# EAGLE board schemat - druk (EAGLE 6.4), part 1 of 2
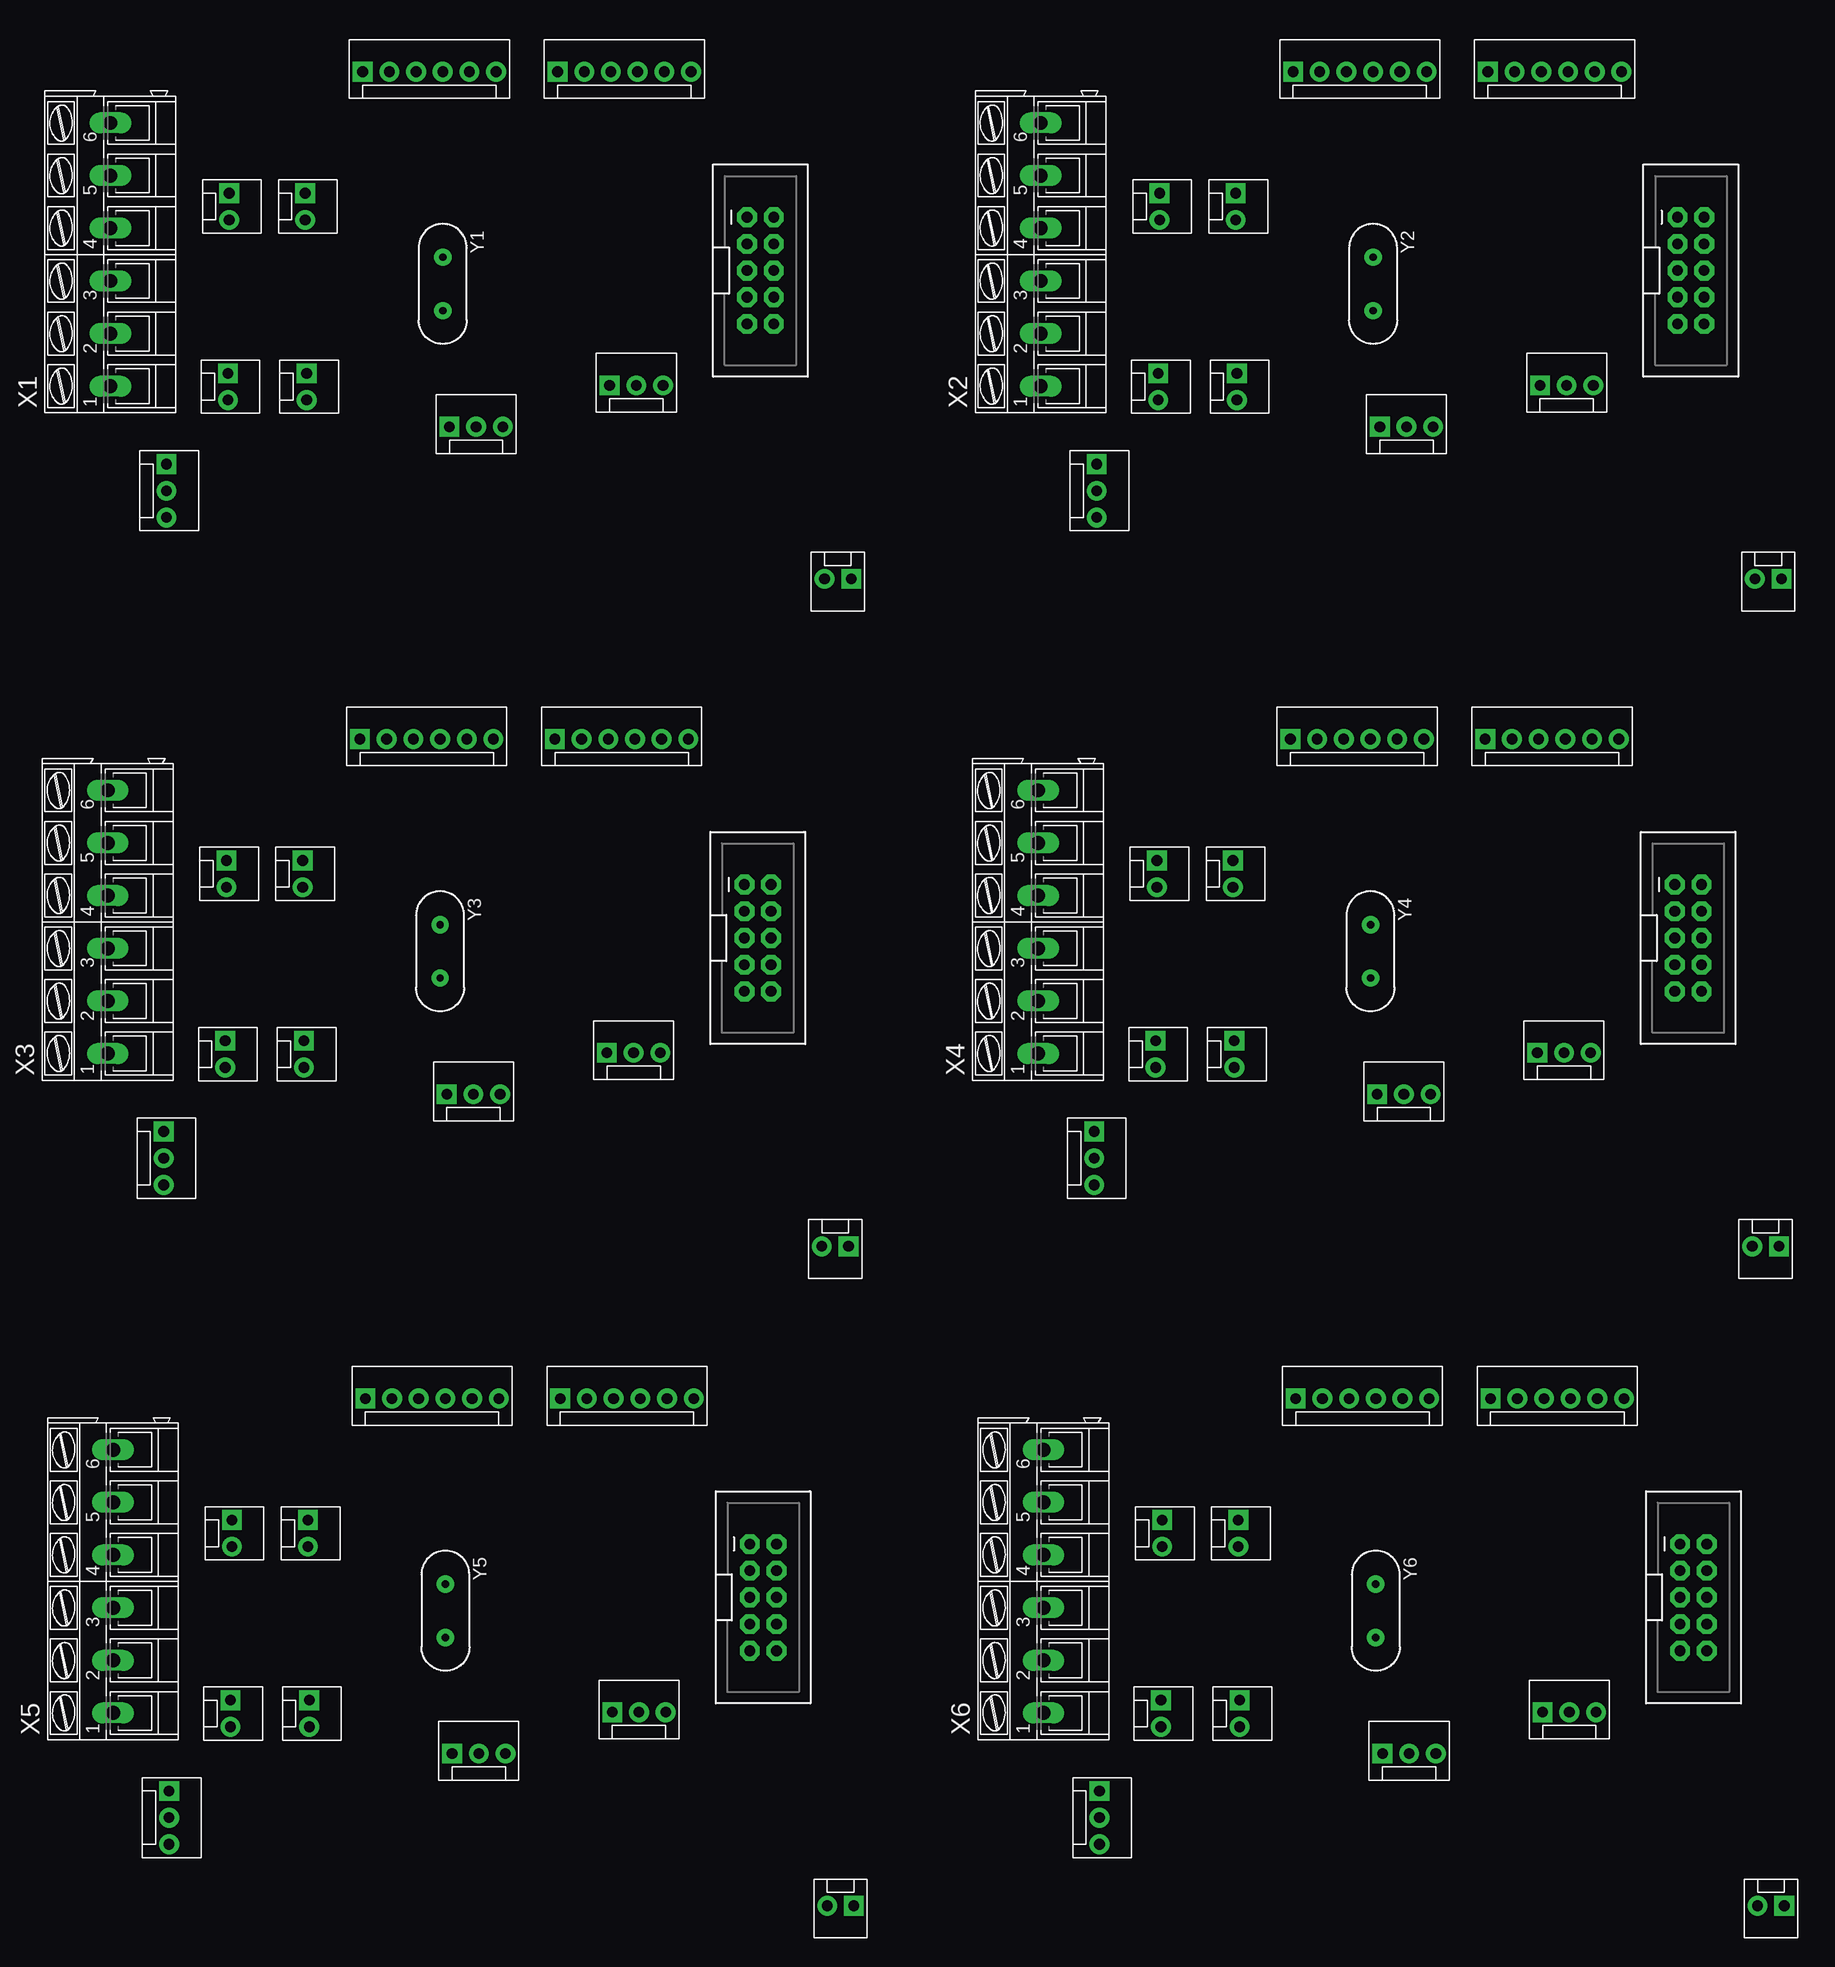
[diagram p0: board, top side]
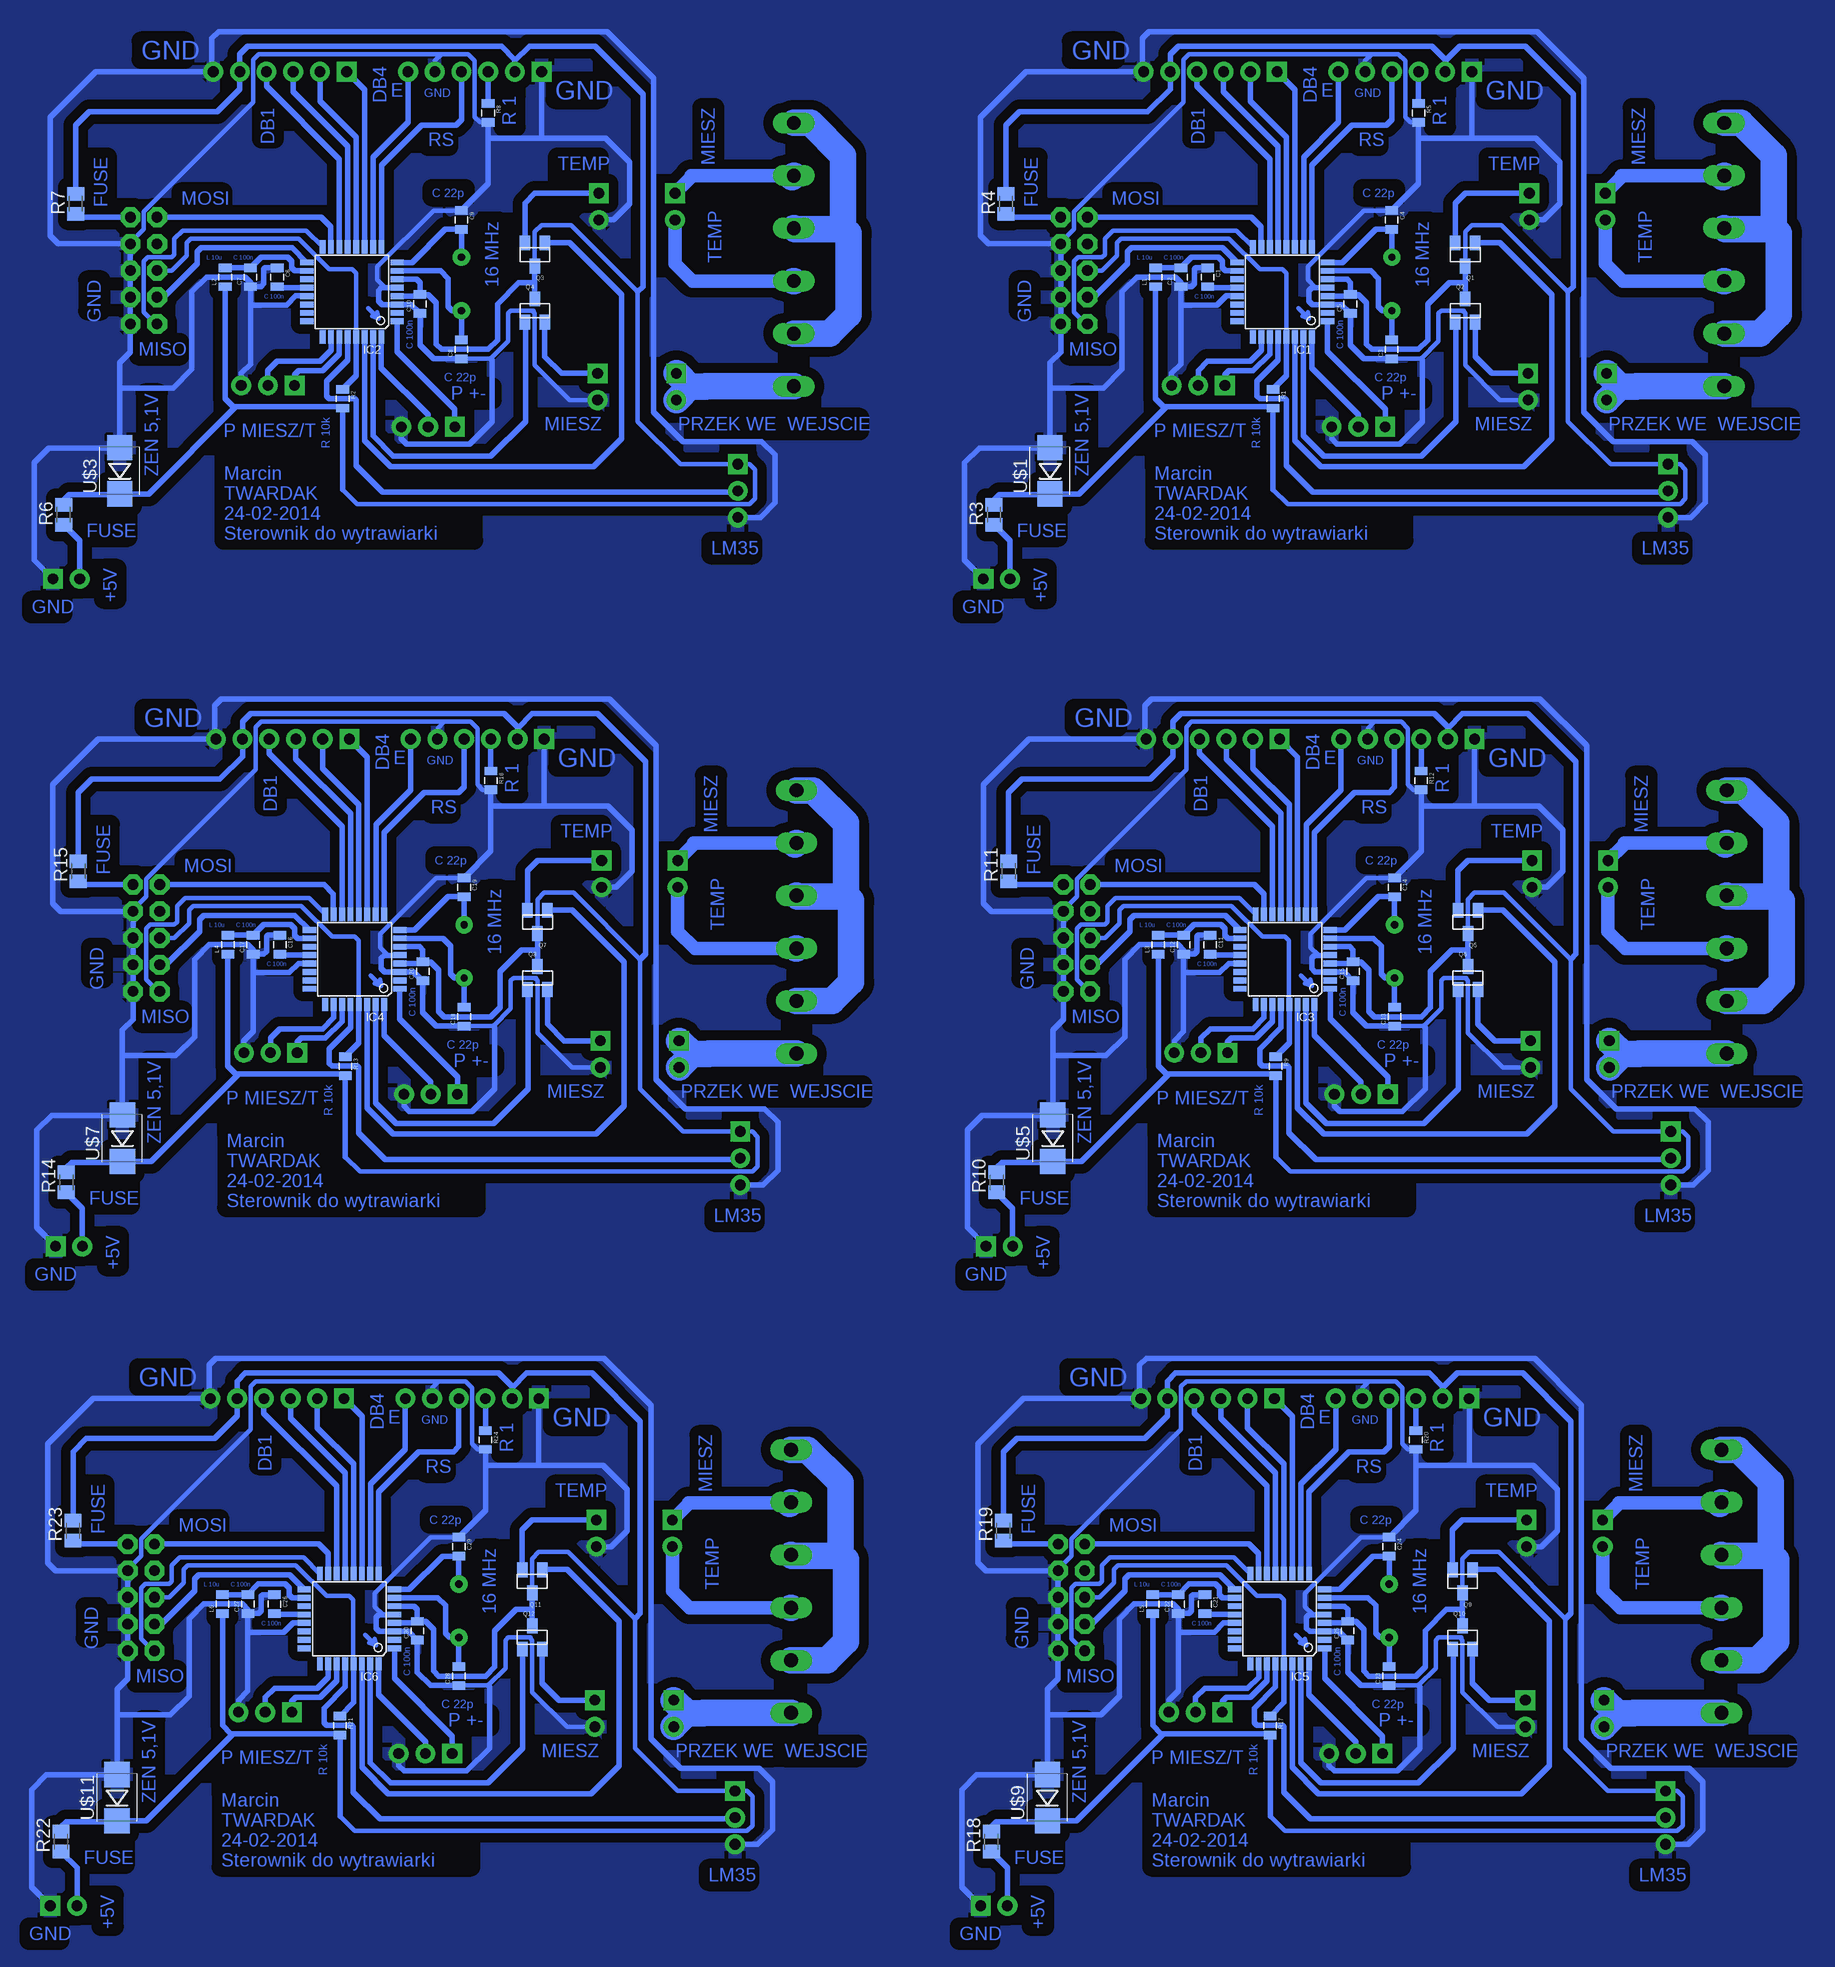
[diagram p1: board, bottom side, seen from below]

No outline drawn. Coordinates in mm, seen from the top.
Copper layers (1*16): Top 0.035mm / dielectric 1.5mm / Bottom 0.035mm
Design rules "default": minimum track width 10mil, minimum drill 24mil, track to track 8mil, track to pad 8mil, pad to pad 8mil, via to via 8mil, smd to smd 8mil, copper to edge 40mil, drill to drill 8mil, minimum pad ring 10mil, minimum via ring 8mil, stop-mask expansion 4mil, vias tented up to drill 0mil, thermal gap 10mil

## Footprints (pad centres in the part's own frame; a part is rotated, then mirrored left to right if it is on the bottom)
0805 = smd 0.8 x 1.2: 1 -0.9,0; 2 0.9,0
TQFP32-08 = smd 1.27 x 0.559: 1 -4.293,2.8; 2 -4.293,2; 3 -4.293,1.2; 4 -4.293,0.4; 5 -4.293,-0.4; 6 -4.293,-1.2; 7 -4.293,-2; 8 -4.293,-2.8; 17 4.293,-2.8; 18 4.293,-2; 19 4.293,-1.2; 20 4.293,-0.4; 21 4.293,0.4; 22 4.293,1.2; 23 4.293,2; 24 4.293,2.8 | smd 0.559 x 1.27: 9 -2.8,-4.293; 10 -2,-4.293; 11 -1.2,-4.293; 12 -0.4,-4.293; 13 0.4,-4.293; 14 1.2,-4.293; 15 2,-4.293; 16 2.8,-4.293; 25 2.8,4.293; 26 2,4.293; 27 1.2,4.293; 28 0.4,4.293; 29 -0.4,4.293; 30 -1.2,4.293; 31 -2,4.293; 32 -2.8,4.293
MOLEX-1X6 = drill 1.016 pad 1.88 square: 1 0,0 | drill 1.016 pad 1.88: 2 2.54,0; 3 5.08,0; 4 7.62,0; 5 10.16,0; 6 12.7,0
MOLEX-1X3 = drill 1.016 pad 1.88 square: 1 0,0 | drill 1.016 pad 1.88: 2 2.54,0; 3 5.08,0
MOLEX-1X2 = drill 1.016 pad 1.88 square: 1 0,0 | drill 1.016 pad 1.88: 2 2.54,0
SOT23 = smd 1 x 1.4: 1 -0.95,-1.1; 2 0.95,-1.1; 3 0,1.1
M0805 = smd 1.3 x 1.6: 1 -0.95,0; 2 0.95,0
SMB-DIODE = smd 2.4 x 2.4: A 2.2,0; C -2.2,0
2X5-SHROUDED = drill 1.016 pad 1.88 octagon: 1 -1.27,5.08; 2 1.27,5.08; 3 -1.27,2.54; 4 1.27,2.54; 5 -1.27,0; 6 1.27,0; 7 -1.27,-2.54; 8 1.27,-2.54; 9 -1.27,-5.08; 10 1.27,-5.08
AK300/6 = drill 1.321 long: 1 -12.522,0; 2 -7.518,0; 3 -2.515,0; 4 2.515,0; 5 7.518,0; 6 12.522,0
HC49US = drill 0.7 pad 1.651: 1 -2.54,0; 2 2.54,0

## Placement (x,y rotation side)
C1  100n  [0805]  51.69,100.46 270 bottom
C2  100n  [0805]  54.23,100.46 90 bottom
C3  22p  [0805]  34.16,93.6 90 bottom
C4  22p  [0805]  34.16,105.92 270 bottom
C5  100n  [0805]  38.1,97.92 90 bottom
C6  100n  [0805]  140.21,100.46 270 bottom
C7  100n  [0805]  142.75,100.46 90 bottom
C8  22p  [0805]  122.68,93.6 90 bottom
C9  22p  [0805]  122.68,105.92 270 bottom
C10  100n  [0805]  126.62,97.92 90 bottom
C11  100n  [0805]  51.44,36.96 270 bottom
C12  100n  [0805]  53.98,36.96 90 bottom
C13  22p  [0805]  33.91,30.1 90 bottom
C14  22p  [0805]  33.91,42.42 270 bottom
C15  100n  [0805]  37.85,34.42 90 bottom
C16  100n  [0805]  139.95,36.96 270 bottom
C17  100n  [0805]  142.49,36.96 90 bottom
C18  22p  [0805]  122.43,30.1 90 bottom
C19  22p  [0805]  122.43,42.42 270 bottom
C20  100n  [0805]  126.36,34.42 90 bottom
C21  100n  [0805]  51.94,-25.78 270 bottom
C22  100n  [0805]  54.48,-25.78 90 bottom
C23  22p  [0805]  34.42,-32.64 90 bottom
C24  22p  [0805]  34.42,-20.32 270 bottom
C25  100n  [0805]  38.35,-28.32 90 bottom
C26  100n  [0805]  140.46,-25.78 270 bottom
C27  100n  [0805]  143,-25.78 90 bottom
C28  22p  [0805]  122.94,-32.64 90 bottom
C29  22p  [0805]  122.94,-20.32 270 bottom
C30  100n  [0805]  126.87,-28.32 90 bottom
IC1  MEGA8-AI  [TQFP32-08]  44.58,99.06 180 bottom
IC2  MEGA8-AI  [TQFP32-08]  133.1,99.06 180 bottom
IC3  MEGA8-AI  [TQFP32-08]  44.32,35.56 180 bottom
IC4  MEGA8-AI  [TQFP32-08]  132.84,35.56 180 bottom
IC5  MEGA8-AI  [TQFP32-08]  44.83,-27.18 180 bottom
IC6  MEGA8-AI  [TQFP32-08]  133.35,-27.18 180 bottom
L1  10u  [0805]  56.64,100.46 90 bottom
L2  10u  [0805]  145.16,100.46 90 bottom
L3  10u  [0805]  56.39,36.96 90 bottom
L4  10u  [0805]  144.91,36.96 90 bottom
L5  10u  [0805]  56.9,-25.78 90 bottom
L6  10u  [0805]  145.41,-25.78 90 bottom
LCD1  [MOLEX-1X6]  45.09,120.02 0 top
LCD2  [MOLEX-1X6]  26.54,120.02 0 top
LCD3  [MOLEX-1X6]  133.6,120.02 0 top
LCD4  [MOLEX-1X6]  115.06,120.02 0 top
LCD5  [MOLEX-1X6]  44.83,56.52 0 top
LCD6  [MOLEX-1X6]  26.29,56.52 0 top
LCD7  [MOLEX-1X6]  133.35,56.52 0 top
LCD8  [MOLEX-1X6]  114.81,56.52 0 top
LCD9  [MOLEX-1X6]  45.34,-6.22 0 top
LCD10  [MOLEX-1X6]  26.8,-6.22 0 top
LCD11  [MOLEX-1X6]  133.86,-6.22 0 top
LCD12  [MOLEX-1X6]  115.32,-6.22 0 top
LM1  [MOLEX-1X3]  96.39,82.68 270 top
LM2  [MOLEX-1X3]  7.62,19.18 270 top
LM3  [MOLEX-1X3]  96.14,19.18 270 top
LM4  [MOLEX-1X3]  8.13,-43.56 270 top
LM5  [MOLEX-1X3]  96.65,-43.56 270 top
LM35  [MOLEX-1X3]  7.87,82.68 270 top
MIESZANIE  M02POLAR  [MOLEX-1X2]  21.21,91.31 270 top
MIESZANIE1  M02POLAR  [MOLEX-1X2]  109.73,91.31 270 top
MIESZANIE2  M02POLAR  [MOLEX-1X2]  20.95,27.81 270 top
MIESZANIE3  M02POLAR  [MOLEX-1X2]  109.47,27.81 270 top
MIESZANIE4  M02POLAR  [MOLEX-1X2]  21.46,-34.92 270 top
MIESZANIE5  M02POLAR  [MOLEX-1X2]  109.98,-34.92 270 top
NAPIECIE  M02POLAR  [MOLEX-1X2]  73.03,71.75 180 top
NAPIECIE1  M02POLAR  [MOLEX-1X2]  161.54,71.75 180 top
NAPIECIE2  M02POLAR  [MOLEX-1X2]  72.77,8.26 180 top
NAPIECIE3  M02POLAR  [MOLEX-1X2]  161.29,8.26 180 top
NAPIECIE4  M02POLAR  [MOLEX-1X2]  73.28,-54.48 180 top
NAPIECIE5  M02POLAR  [MOLEX-1X2]  161.8,-54.48 180 top
PRZEKAZNIK_NAPIECIE  M02POLAR  [MOLEX-1X2]  13.72,91.31 270 top
PRZEKAZNIK_NAPIECIE1  M02POLAR  [MOLEX-1X2]  102.23,91.31 270 top
PRZEKAZNIK_NAPIECIE2  M02POLAR  [MOLEX-1X2]  13.46,27.81 270 top
PRZEKAZNIK_NAPIECIE3  M02POLAR  [MOLEX-1X2]  101.98,27.81 270 top
PRZEKAZNIK_NAPIECIE4  M02POLAR  [MOLEX-1X2]  13.97,-34.92 270 top
PRZEKAZNIK_NAPIECIE5  M02POLAR  [MOLEX-1X2]  102.49,-34.92 270 top
PRZYCISKI_+-  [MOLEX-1X3]  34.8,86.23 0 top
PRZYCISKI_+-1  [MOLEX-1X3]  123.32,86.23 0 top
PRZYCISKI_+-2  [MOLEX-1X3]  34.54,22.73 0 top
PRZYCISKI_+-3  [MOLEX-1X3]  123.06,22.73 0 top
PRZYCISKI_+-4  [MOLEX-1X3]  35.05,-40.01 0 top
PRZYCISKI_+-5  [MOLEX-1X3]  123.57,-40.01 0 top
PRZYCISKI_MIESZ_TEMP  [MOLEX-1X3]  50.04,90.17 0 top
PRZYCISKI_MIESZ_TEMP1  [MOLEX-1X3]  138.56,90.17 0 top
PRZYCISKI_MIESZ_TEMP2  [MOLEX-1X3]  49.78,26.67 0 top
PRZYCISKI_MIESZ_TEMP3  [MOLEX-1X3]  138.3,26.67 0 top
PRZYCISKI_MIESZ_TEMP4  [MOLEX-1X3]  50.29,-36.07 0 top
PRZYCISKI_MIESZ_TEMP5  [MOLEX-1X3]  138.81,-36.07 0 top
Q1  N-MOSFET BSS138  [SOT23]  27.18,102.62 180 bottom
Q2  N-MOSFET BSS138  [SOT23]  27.18,97.28 0 bottom
Q3  N-MOSFET BSS138  [SOT23]  115.7,102.62 180 bottom
Q4  N-MOSFET BSS138  [SOT23]  115.7,97.28 0 bottom
Q5  N-MOSFET BSS138  [SOT23]  26.92,39.12 180 bottom
Q6  N-MOSFET BSS138  [SOT23]  26.92,33.78 0 bottom
Q7  N-MOSFET BSS138  [SOT23]  115.44,39.12 180 bottom
Q8  N-MOSFET BSS138  [SOT23]  115.44,33.78 0 bottom
Q9  N-MOSFET BSS138  [SOT23]  27.43,-23.62 180 bottom
Q10  N-MOSFET BSS138  [SOT23]  27.43,-28.96 0 bottom
Q11  N-MOSFET BSS138  [SOT23]  115.95,-23.62 180 bottom
Q12  N-MOSFET BSS138  [SOT23]  115.95,-28.96 0 bottom
R1  10k  [0805]  45.47,88.9 270 bottom
R2  10k  [0805]  133.99,88.9 270 bottom
R3  FUSE 500mA  [M0805]  72.01,77.85 90 bottom
R4  FUSE 500mA  [M0805]  70.87,107.44 90 bottom
R5  1  [0805]  31.62,116.08 270 bottom
R6  FUSE 500mA  [M0805]  160.53,77.85 90 bottom
R7  FUSE 500mA  [M0805]  159.38,107.44 90 bottom
R8  1  [0805]  120.14,116.08 270 bottom
R9  10k  [0805]  45.21,25.4 270 bottom
R10  FUSE 500mA  [M0805]  71.75,14.35 90 bottom
R11  FUSE 500mA  [M0805]  70.61,43.94 90 bottom
R12  1  [0805]  31.37,52.58 270 bottom
R13  10k  [0805]  133.73,25.4 270 bottom
R14  FUSE 500mA  [M0805]  160.27,14.35 90 bottom
R15  FUSE 500mA  [M0805]  159.13,43.94 90 bottom
R16  1  [0805]  119.89,52.58 270 bottom
R17  10k  [0805]  45.72,-37.34 270 bottom
R18  FUSE 500mA  [M0805]  72.26,-48.39 90 bottom
R19  FUSE 500mA  [M0805]  71.12,-18.8 90 bottom
R20  1  [0805]  31.88,-10.16 270 bottom
R21  10k  [0805]  134.24,-37.34 270 bottom
R22  FUSE 500mA  [M0805]  160.78,-48.39 90 bottom
R23  FUSE 500mA  [M0805]  159.64,-18.8 90 bottom
R24  1  [0805]  120.4,-10.16 270 bottom
TEMP  M02POLAR  [MOLEX-1X2]  21.08,108.46 270 top
TEMP1  M02POLAR  [MOLEX-1X2]  109.6,108.46 270 top
TEMP2  M02POLAR  [MOLEX-1X2]  20.83,44.96 270 top
TEMP3  M02POLAR  [MOLEX-1X2]  109.35,44.96 270 top
TEMP4  M02POLAR  [MOLEX-1X2]  21.34,-17.78 270 top
TEMP5  M02POLAR  [MOLEX-1X2]  109.86,-17.78 270 top
TEMP_PRZEKAZNIK  M02POLAR  [MOLEX-1X2]  13.84,108.46 270 top
TEMP_PRZEKAZNIK1  M02POLAR  [MOLEX-1X2]  102.36,108.46 270 top
TEMP_PRZEKAZNIK2  M02POLAR  [MOLEX-1X2]  13.59,44.96 270 top
TEMP_PRZEKAZNIK3  M02POLAR  [MOLEX-1X2]  102.11,44.96 270 top
TEMP_PRZEKAZNIK4  M02POLAR  [MOLEX-1X2]  14.1,-17.78 270 top
TEMP_PRZEKAZNIK5  M02POLAR  [MOLEX-1X2]  102.62,-17.78 270 top
U$1  ZENER 5V  [SMB-DIODE]  66.67,82.04 90 bottom
U$2  AVR_SPI_PROG2PTH2  [2X5-SHROUDED]  64.39,101.09 0 top
U$3  ZENER 5V  [SMB-DIODE]  155.19,82.04 90 bottom
U$4  AVR_SPI_PROG2PTH2  [2X5-SHROUDED]  152.91,101.09 0 top
U$5  ZENER 5V  [SMB-DIODE]  66.42,18.54 90 bottom
U$6  AVR_SPI_PROG2PTH2  [2X5-SHROUDED]  64.14,37.59 0 top
U$7  ZENER 5V  [SMB-DIODE]  154.94,18.54 90 bottom
U$8  AVR_SPI_PROG2PTH2  [2X5-SHROUDED]  152.65,37.59 0 top
U$9  ZENER 5V  [SMB-DIODE]  66.93,-44.2 90 bottom
U$10  AVR_SPI_PROG2PTH2  [2X5-SHROUDED]  64.64,-25.15 0 top
U$11  ZENER 5V  [SMB-DIODE]  155.45,-44.2 90 bottom
U$12  AVR_SPI_PROG2PTH2  [2X5-SHROUDED]  153.16,-25.15 0 top
X1  [AK300/6]  2.54,102.62 90 top
X2  [AK300/6]  91.06,102.62 90 top
X3  [AK300/6]  2.29,39.12 90 top
X4  [AK300/6]  90.81,39.12 90 top
X5  [AK300/6]  2.79,-23.62 90 top
X6  [AK300/6]  91.31,-23.62 90 top
Y1  16MHz  [HC49US]  34.16,99.82 270 top
Y2  16MHz  [HC49US]  122.68,99.82 270 top
Y3  16MHz  [HC49US]  33.91,36.32 270 top
Y4  16MHz  [HC49US]  122.43,36.32 270 top
Y5  16MHz  [HC49US]  34.42,-26.42 270 top
Y6  16MHz  [HC49US]  122.94,-26.42 270 top

## Library data of the parts
C1-C30 L1-L6 R1 R2 R5 R8 R9 R12 R13 R16 R17 R20 R21 R24 = SparkFun-Passives
IC1-IC6 = atmel; MPN: ATMEGA8-16AU; OC_FARNELL: 9171371; OC_NEWARK: 73M8863
LCD1-LCD12 LM1-LM5 LM35 MIESZANIE MIESZANIE1-MIESZANIE5 NAPIECIE NAPIECIE1-NAPIECIE5 PRZEKAZNIK_NAPIECIE PRZEKAZNIK_NAPIECIE1-PRZEKAZNIK_NAPIECIE5 PRZYCISKI_+- PRZYCISKI_+-1-PRZYCISKI_+-5 PRZYCISKI_MIESZ_TEMP PRZYCISKI_MIESZ_TEMP1-PRZYCISKI_MIESZ_TEMP5 TEMP TEMP1-TEMP5 TEMP_PRZEKAZNIK TEMP_PRZEKAZNIK1-TEMP_PRZEKAZNIK5 U$2 U$4 U$6 U$8 U$10 U$12 = SparkFun-Connectors
Q1-Q12 = SparkFun-DiscreteSemi; PROD_ID: TRANS-08345
R3 R4 R6 R7 R10 R11 R14 R15 R18 R19 R22 R23 = resistor
U$1 U$3 U$5 U$7 U$9 U$11 = SparkFun-DiscreteSemi
X1-X6 = con-ptr500; OC_FARNELL: unknown; OC_NEWARK: unknown
Y1-Y6 = SparkFun-FreqCtrl

## Nets
+5V: C5.2 IC1.4 IC1.6 L1.1 LCD1.5 LCD2.2 LM35.1 Q1.3 Q2.3 R1.2 R3.2 R4.2 U$1.C
+5V1: C10.2 IC2.4 IC2.6 L2.1 LCD3.5 LCD4.2 LM1.1 Q3.3 Q4.3 R2.2 R6.2 R7.2 U$3.C
+5V2: C15.2 IC3.4 IC3.6 L3.1 LCD5.5 LCD6.2 LM2.1 Q5.3 Q6.3 R9.2 R10.2 R11.2 U$5.C
+5V3: C20.2 IC4.4 IC4.6 L4.1 LCD7.5 LCD8.2 LM3.1 Q7.3 Q8.3 R13.2 R14.2 R15.2 U$7.C
+5V4: C25.2 IC5.4 IC5.6 L5.1 LCD9.5 LCD10.2 LM4.1 Q9.3 Q10.3 R17.2 R18.2 R19.2 U$9.C
+5V5: C30.2 IC6.4 IC6.6 L6.1 LCD11.5 LCD12.2 LM5.1 Q11.3 Q12.3 R21.2 R22.2 R23.2 U$11.C
AGND: X1.2 X1.4 X1.6
AGND1: X2.2 X2.4 X2.6
AGND2: X3.2 X3.4 X3.6
AGND3: X4.2 X4.4 X4.6
AGND4: X5.2 X5.4 X5.6
AGND5: X6.2 X6.4 X6.6
DB1: IC2.11 LCD3.1
DB2: IC2.12 LCD3.2
DB3: IC2.13 LCD3.3
DB4: IC1.11 LCD1.1
DB5: IC1.12 LCD1.2
DB6: IC1.13 LCD1.3
DB7: IC1.14 LCD1.4
DB8: IC2.14 LCD3.4
DB9: IC3.11 LCD5.1
DB10: IC3.12 LCD5.2
DB11: IC3.13 LCD5.3
DB12: IC3.14 LCD5.4
DB13: IC4.11 LCD7.1
DB14: IC4.12 LCD7.2
DB15: IC4.13 LCD7.3
DB16: IC4.14 LCD7.4
DB17: IC5.11 LCD9.1
DB18: IC5.12 LCD9.2
DB19: IC5.13 LCD9.3
DB20: IC5.14 LCD9.4
DB21: IC6.11 LCD11.1
DB22: IC6.12 LCD11.2
DB23: IC6.13 LCD11.3
DB24: IC6.14 LCD11.4
E: IC1.10 LCD2.6
E1: IC2.10 LCD4.6
E2: IC3.10 LCD6.6
E3: IC4.10 LCD8.6
E4: IC5.10 LCD10.6
E5: IC6.10 LCD12.6
GND: C1.1 C2.1 C3.1 C4.1 C5.1 IC1.3 IC1.5 IC1.21 LCD1.6 LCD2.1 LCD2.5 LM35.3 MIESZANIE.2 NAPIECIE.1 PRZYCISKI_+-.3 PRZYCISKI_MIESZ_TEMP.3 R5.2 TEMP.2 U$1.A U$2.4 U$2.6 U$2.8 U$2.10
GND1: C6.1 C7.1 C8.1 C9.1 C10.1 IC2.3 IC2.5 IC2.21 LCD3.6 LCD4.1 LCD4.5 LM1.3 MIESZANIE1.2 NAPIECIE1.1 PRZYCISKI_+-1.3 PRZYCISKI_MIESZ_TEMP1.3 R8.2 TEMP1.2 U$3.A U$4.4 U$4.6 U$4.8 U$4.10
GND2: C11.1 C12.1 C13.1 C14.1 C15.1 IC3.3 IC3.5 IC3.21 LCD5.6 LCD6.1 LCD6.5 LM2.3 MIESZANIE2.2 NAPIECIE2.1 PRZYCISKI_+-2.3 PRZYCISKI_MIESZ_TEMP2.3 R12.2 TEMP2.2 U$5.A U$6.4 U$6.6 U$6.8 U$6.10
GND3: C16.1 C17.1 C18.1 C19.1 C20.1 IC4.3 IC4.5 IC4.21 LCD7.6 LCD8.1 LCD8.5 LM3.3 MIESZANIE3.2 NAPIECIE3.1 PRZYCISKI_+-3.3 PRZYCISKI_MIESZ_TEMP3.3 R16.2 TEMP3.2 U$7.A U$8.4 U$8.6 U$8.8 U$8.10
GND4: C21.1 C22.1 C23.1 C24.1 C25.1 IC5.3 IC5.5 IC5.21 LCD9.6 LCD10.1 LCD10.5 LM4.3 MIESZANIE4.2 NAPIECIE4.1 PRZYCISKI_+-4.3 PRZYCISKI_MIESZ_TEMP4.3 R20.2 TEMP4.2 U$9.A U$10.4 U$10.6 U$10.8 U$10.10
GND5: C26.1 C27.1 C28.1 C29.1 C30.1 IC6.3 IC6.5 IC6.21 LCD11.6 LCD12.1 LCD12.5 LM5.3 MIESZANIE5.2 NAPIECIE5.1 PRZYCISKI_+-5.3 PRZYCISKI_MIESZ_TEMP5.3 R24.2 TEMP5.2 U$11.A U$12.4 U$12.6 U$12.8 U$12.10
LM1: IC2.28 LM1.2
LM2: IC3.28 LM2.2
LM3: IC4.28 LM3.2
LM4: IC5.28 LM4.2
LM5: IC6.28 LM5.2
LM35: IC1.28 LM35.2
MIESZANIE: IC1.31 Q2.1
MIESZANIE1: IC2.31 Q4.1
MIESZANIE2: IC3.31 Q6.1
MIESZANIE3: IC4.31 Q8.1
MIESZANIE4: IC5.31 Q10.1
MIESZANIE5: IC6.31 Q12.1
MISO: IC1.16 U$2.9
MISO1: IC2.16 U$4.9
MISO2: IC3.16 U$6.9
MISO3: IC4.16 U$8.9
MISO4: IC5.16 U$10.9
MISO5: IC6.16 U$12.9
MOSI: IC1.15 U$2.1
MOSI1: IC2.15 U$4.1
MOSI2: IC3.15 U$6.1
MOSI3: IC4.15 U$8.1
MOSI4: IC5.15 U$10.1
MOSI5: IC6.15 U$12.1
N$2: C2.2 IC1.18 L1.2
N$3: C1.2 IC1.20
N$4: Q1.2 TEMP.1
N$5: MIESZANIE.1 Q2.2
N$6: C4.2 IC1.8 Y1.1
N$7: C3.2 IC1.7 Y1.2
N$8: NAPIECIE.2 R3.1
N$9: C7.2 IC2.18 L2.2
N$10: TEMP_PRZEKAZNIK.2 X1.3
N$11: R4.1 U$2.2
N$12: C6.2 IC2.20
N$13: C9.2 IC2.8 Y2.1
N$14: TEMP_PRZEKAZNIK.1 X1.5
N$15: C8.2 IC2.7 Y2.2
N$16: LCD2.3 R5.1
N$17: Q3.2 TEMP1.1
N$18: MIESZANIE1.1 Q4.2
N$19: TEMP_PRZEKAZNIK1.1 X2.5
N$20: NAPIECIE1.2 R6.1
N$21: TEMP_PRZEKAZNIK1.2 X2.3
N$22: R7.1 U$4.2
N$23: LCD4.3 R8.1
N$25: C12.2 IC3.18 L3.2
N$26: C11.2 IC3.20
N$27: C14.2 IC3.8 Y3.1
N$28: C13.2 IC3.7 Y3.2
N$29: Q5.2 TEMP2.1
N$30: MIESZANIE2.1 Q6.2
N$31: TEMP_PRZEKAZNIK2.1 X3.5
N$32: NAPIECIE2.2 R10.1
N$33: TEMP_PRZEKAZNIK2.2 X3.3
N$34: R11.1 U$6.2
N$35: LCD6.3 R12.1
N$37: C17.2 IC4.18 L4.2
N$38: C16.2 IC4.20
N$39: C19.2 IC4.8 Y4.1
N$40: C18.2 IC4.7 Y4.2
N$41: Q7.2 TEMP3.1
N$42: MIESZANIE3.1 Q8.2
N$43: TEMP_PRZEKAZNIK3.1 X4.5
N$44: NAPIECIE3.2 R14.1
N$45: TEMP_PRZEKAZNIK3.2 X4.3
N$46: R15.1 U$8.2
N$47: LCD8.3 R16.1
N$49: C22.2 IC5.18 L5.2
N$50: C21.2 IC5.20
N$51: C24.2 IC5.8 Y5.1
N$52: C23.2 IC5.7 Y5.2
N$53: Q9.2 TEMP4.1
N$54: MIESZANIE4.1 Q10.2
N$55: TEMP_PRZEKAZNIK4.1 X5.5
N$56: NAPIECIE4.2 R18.1
N$57: TEMP_PRZEKAZNIK4.2 X5.3
N$58: R19.1 U$10.2
N$59: LCD10.3 R20.1
N$61: C27.2 IC6.18 L6.2
N$62: C26.2 IC6.20
N$63: C29.2 IC6.8 Y6.1
N$64: C28.2 IC6.7 Y6.2
N$65: Q11.2 TEMP5.1
N$66: MIESZANIE5.1 Q12.2
N$67: TEMP_PRZEKAZNIK5.1 X6.5
N$68: NAPIECIE5.2 R22.1
N$69: TEMP_PRZEKAZNIK5.2 X6.3
N$70: R23.1 U$12.2
N$71: LCD12.3 R24.1
PRZYCISK+: IC1.32 PRZYCISKI_+-.2
PRZYCISK+1: IC2.32 PRZYCISKI_+-1.2
PRZYCISK+2: IC3.32 PRZYCISKI_+-2.2
PRZYCISK+3: IC4.32 PRZYCISKI_+-3.2
PRZYCISK+4: IC5.32 PRZYCISKI_+-4.2
PRZYCISK+5: IC6.32 PRZYCISKI_+-5.2
PRZYCISK-: IC1.1 PRZYCISKI_+-.1
PRZYCISK-1: IC2.1 PRZYCISKI_+-1.1
PRZYCISK-2: IC3.1 PRZYCISKI_+-2.1
PRZYCISK-3: IC4.1 PRZYCISKI_+-3.1
PRZYCISK-4: IC5.1 PRZYCISKI_+-4.1
PRZYCISK-5: IC6.1 PRZYCISKI_+-5.1
PRZYCISK_MIESZANIE: IC1.27 PRZYCISKI_MIESZ_TEMP.1
PRZYCISK_MIESZANIE1: IC2.27 PRZYCISKI_MIESZ_TEMP1.1
PRZYCISK_MIESZANIE2: IC3.27 PRZYCISKI_MIESZ_TEMP2.1
PRZYCISK_MIESZANIE3: IC4.27 PRZYCISKI_MIESZ_TEMP3.1
PRZYCISK_MIESZANIE4: IC5.27 PRZYCISKI_MIESZ_TEMP4.1
PRZYCISK_MIESZANIE5: IC6.27 PRZYCISKI_MIESZ_TEMP5.1
PRZYCISK_TEMP: IC1.26 PRZYCISKI_MIESZ_TEMP.2
PRZYCISK_TEMP1: IC2.26 PRZYCISKI_MIESZ_TEMP1.2
PRZYCISK_TEMP2: IC3.26 PRZYCISKI_MIESZ_TEMP2.2
PRZYCISK_TEMP3: IC4.26 PRZYCISKI_MIESZ_TEMP3.2
PRZYCISK_TEMP4: IC5.26 PRZYCISKI_MIESZ_TEMP4.2
PRZYCISK_TEMP5: IC6.26 PRZYCISKI_MIESZ_TEMP5.2
RESET: IC1.29 R1.1 U$2.5
RESET1: IC2.29 R2.1 U$4.5
RESET2: IC3.29 R9.1 U$6.5
RESET3: IC4.29 R13.1 U$8.5
RESET4: IC5.29 R17.1 U$10.5
RESET5: IC6.29 R21.1 U$12.5
RS: IC1.9 LCD2.4
RS1: IC2.9 LCD4.4
RS2: IC3.9 LCD6.4
RS3: IC4.9 LCD8.4
RS4: IC5.9 LCD10.4
RS5: IC6.9 LCD12.4
SCK: IC1.17 U$2.7
SCK1: IC2.17 U$4.7
SCK2: IC3.17 U$6.7
SCK3: IC4.17 U$8.7
SCK4: IC5.17 U$10.7
SCK5: IC6.17 U$12.7
TEMP: IC1.30 Q1.1
TEMP1: IC2.30 Q3.1
TEMP2: IC3.30 Q5.1
TEMP3: IC4.30 Q7.1
TEMP4: IC5.30 Q9.1
TEMP5: IC6.30 Q11.1
VDD: PRZEKAZNIK_NAPIECIE.1 PRZEKAZNIK_NAPIECIE.2 X1.1
VDD1: PRZEKAZNIK_NAPIECIE1.1 PRZEKAZNIK_NAPIECIE1.2 X2.1
VDD2: PRZEKAZNIK_NAPIECIE2.1 PRZEKAZNIK_NAPIECIE2.2 X3.1
VDD3: PRZEKAZNIK_NAPIECIE3.1 PRZEKAZNIK_NAPIECIE3.2 X4.1
VDD4: PRZEKAZNIK_NAPIECIE4.1 PRZEKAZNIK_NAPIECIE4.2 X5.1
VDD5: PRZEKAZNIK_NAPIECIE5.1 PRZEKAZNIK_NAPIECIE5.2 X6.1
ZAPISZ: IC1.24
ZAPISZ1: IC2.24
ZAPISZ2: IC3.24
ZAPISZ3: IC4.24
ZAPISZ4: IC5.24
ZAPISZ5: IC6.24

## Tracks (layer width: path | path; a pad name or v marks a point on that pad's centre or on a via)
+5V
  Bottom 0.406: Q1.3 27.18,104.78 26.54,105.41 23.75,105.41 17.4,99.06 17.4,86.74 13.34,82.68 LM35.1 6.73,82.68 6.22,82.17 6.22,79.38 6.73,78.87 44.07,78.87 45.47,80.26
  Bottom 0.508: R4.2 70.87,114.94 69.6,116.2 57.4,116.2 55.24,118.36 LCD1.5 55.24,121.67 54.48,122.43 30.35,122.43 29.08,121.16 LCD2.2 29.08,121.03 27.69,122.43 21.46,122.43 16.89,117.86 16.89,99.57 17.4,99.06 | R3.2 72.01,79.25 71.5,79.76 66.76,79.76 U$1.C 63.92,79.84 55.63,88.14 | L1.1 56.64,88.9 55.88,88.14 55.63,88.14 | IC1.4 38.26,98.66 C5.2 | 27.18,99.95 Q1.3 | Q2.3 27.18,99.95 | 27.18,99.95 28.7,99.95 30.73,97.92 30.73,94.49 31.62,93.6 36.07,93.6 36.58,94.11 36.58,98.04 37.34,98.81 38.09,98.81 C5.2 | IC1.6 38.41,100.26 38.1,99.95 C5.2 | 45.47,80.26 R1.2 45.6,88.14 55.63,88.14
+5V1
  Bottom 0.406: Q3.3 115.7,104.78 115.06,105.41 112.27,105.41 105.92,99.06 105.92,86.74 101.85,82.68 LM1.1 95.25,82.68 94.74,82.17 94.74,79.38 95.25,78.87 132.59,78.87 133.99,80.26
  Bottom 0.508: R7.2 159.38,114.94 158.12,116.2 145.92,116.2 143.76,118.36 LCD3.5 143.76,121.67 143,122.43 118.87,122.43 117.6,121.16 LCD4.2 117.6,121.03 116.2,122.43 109.98,122.43 105.41,117.86 105.41,99.57 105.92,99.06 | R6.2 160.53,79.25 160.02,79.76 155.28,79.76 U$3.C 152.44,79.84 144.15,88.14 | L2.1 145.16,88.9 144.4,88.14 144.15,88.14 | IC2.4 126.78,98.66 C10.2 | 115.7,99.95 Q3.3 | Q4.3 115.7,99.95 | 115.7,99.95 117.22,99.95 119.25,97.92 119.25,94.49 120.14,93.6 124.59,93.6 125.09,94.11 125.09,98.04 125.86,98.81 126.61,98.81 C10.2 | IC2.6 126.93,100.26 126.62,99.95 C10.2 | 133.99,80.26 R2.2 134.12,88.14 144.15,88.14
+5V2
  Bottom 0.406: Q5.3 26.92,41.27 26.29,41.91 23.5,41.91 17.14,35.56 17.14,23.24 13.08,19.18 LM2.1 6.48,19.18 5.97,18.67 5.97,15.88 6.48,15.37 43.81,15.37 45.21,16.76
  Bottom 0.508: R11.2 70.61,51.44 69.34,52.7 57.15,52.7 54.99,54.86 LCD5.5 54.99,58.17 54.23,58.93 30.1,58.93 28.83,57.66 LCD6.2 28.83,57.53 27.43,58.93 21.21,58.93 16.64,54.36 16.64,36.07 17.14,35.56 | R10.2 71.75,15.75 71.25,16.26 66.51,16.26 U$5.C 63.67,16.34 55.37,24.64 | L3.1 56.39,25.4 55.63,24.64 55.37,24.64 | IC3.4 38,35.16 C15.2 | 26.92,36.45 Q5.3 | Q6.3 26.92,36.45 | 26.92,36.45 28.45,36.45 30.48,34.42 30.48,30.99 31.37,30.1 35.81,30.1 36.32,30.61 36.32,34.54 37.08,35.31 37.84,35.31 C15.2 | IC3.6 38.16,36.76 37.85,36.45 C15.2 | 45.21,16.76 R9.2 45.35,24.64 55.37,24.64
+5V3
  Bottom 0.406: Q7.3 115.44,41.27 114.81,41.91 112.01,41.91 105.66,35.56 105.66,23.24 101.6,19.18 LM3.1 95,19.18 94.49,18.67 94.49,15.88 95,15.37 132.33,15.37 133.73,16.76
  Bottom 0.508: R15.2 159.13,51.44 157.86,52.7 145.67,52.7 143.51,54.86 LCD7.5 143.51,58.17 142.75,58.93 118.62,58.93 117.35,57.66 LCD8.2 117.35,57.53 115.95,58.93 109.73,58.93 105.16,54.36 105.16,36.07 105.66,35.56 | R14.2 160.27,15.75 159.77,16.26 155.03,16.26 U$7.C 152.19,16.34 143.89,24.64 | L4.1 144.91,25.4 144.15,24.64 143.89,24.64 | IC4.4 126.52,35.16 C20.2 | 115.44,36.45 Q7.3 | Q8.3 115.44,36.45 | 115.44,36.45 116.97,36.45 119,34.42 119,30.99 119.89,30.1 124.33,30.1 124.84,30.61 124.84,34.54 125.6,35.31 126.35,35.31 C20.2 | IC4.6 126.68,36.76 126.36,36.45 C20.2 | 133.73,16.76 R13.2 133.87,24.64 143.89,24.64
+5V4
  Bottom 0.406: Q9.3 27.43,-21.46 26.8,-20.83 24,-20.83 17.65,-27.18 17.65,-39.5 13.59,-43.56 LM4.1 6.99,-43.56 6.48,-44.07 6.48,-46.86 6.99,-47.37 44.32,-47.37 45.72,-45.97
  Bottom 0.508: R19.2 71.12,-11.3 69.85,-10.03 57.66,-10.03 55.5,-7.87 LCD9.5 55.5,-4.57 54.74,-3.81 30.61,-3.81 29.34,-5.08 LCD10.2 29.34,-5.21 27.94,-3.81 21.72,-3.81 17.14,-8.38 17.14,-26.67 17.65,-27.18 | R18.2 72.26,-46.99 71.75,-46.48 67.02,-46.48 U$9.C 64.18,-46.4 55.88,-38.1 | L5.1 56.9,-37.34 56.13,-38.1 55.88,-38.1 | IC5.4 38.51,-27.58 C25.2 | 27.43,-26.29 Q9.3 | Q10.3 27.43,-26.29 | 27.43,-26.29 28.96,-26.29 30.99,-28.32 30.99,-31.75 31.88,-32.64 36.32,-32.64 36.83,-32.13 36.83,-28.19 37.59,-27.43 38.34,-27.43 C25.2 | IC5.6 38.66,-25.98 38.35,-26.29 C25.2 | 45.72,-45.97 R17.2 45.86,-38.1 55.88,-38.1
+5V5
  Bottom 0.406: Q11.3 115.95,-21.46 115.32,-20.83 112.52,-20.83 106.17,-27.18 106.17,-39.5 102.11,-43.56 LM5.1 95.5,-43.56 95,-44.07 95,-46.86 95.5,-47.37 132.84,-47.37 134.24,-45.97
  Bottom 0.508: R23.2 159.64,-11.3 158.37,-10.03 146.18,-10.03 144.02,-7.87 LCD11.5 144.02,-4.57 143.26,-3.81 119.13,-3.81 117.86,-5.08 LCD12.2 117.86,-5.21 116.46,-3.81 110.24,-3.81 105.66,-8.38 105.66,-26.67 106.17,-27.18 | R22.2 160.78,-46.99 160.27,-46.48 155.53,-46.48 U$11.C 152.69,-46.4 144.4,-38.1 | L6.1 145.41,-37.34 144.65,-38.1 144.4,-38.1 | IC6.4 127.03,-27.58 C30.2 | 115.95,-26.29 Q11.3 | Q12.3 115.95,-26.29 | 115.95,-26.29 117.47,-26.29 119.51,-28.32 119.51,-31.75 120.4,-32.64 124.84,-32.64 125.35,-32.13 125.35,-28.19 126.11,-27.43 126.86,-27.43 C30.2 | IC6.6 127.18,-25.98 126.87,-26.29 C30.2 | 134.24,-45.97 R21.2 134.38,-38.1 144.4,-38.1
AGND
  Bottom 2.54: X1.2 -0.86,95.1 -2.67,96.9 -2.67,104.52 | -2.67,104.52 -2.67,104.65 -2.29,105.03 2.44,105.03 X1.4 | X1.6 0.96,115.14 -2.16,112.01 -2.16,105.03 -2.67,104.52
AGND1
  Bottom 2.54: X2.2 87.66,95.1 85.85,96.9 85.85,104.52 | 85.85,104.52 85.85,104.65 86.23,105.03 90.96,105.03 X2.4 | X2.6 89.48,115.14 86.36,112.01 86.36,105.03 85.85,104.52
AGND2
  Bottom 2.54: X3.2 -1.12,31.6 -2.92,33.4 -2.92,41.02 | -2.92,41.02 -2.92,41.15 -2.54,41.53 2.18,41.53 X3.4 | X3.6 0.71,51.64 -2.41,48.51 -2.41,41.53 -2.92,41.02
AGND3
  Bottom 2.54: X4.2 87.4,31.6 85.6,33.4 85.6,41.02 | 85.6,41.02 85.6,41.15 85.98,41.53 90.7,41.53 X4.4 | X4.6 89.23,51.64 86.11,48.51 86.11,41.53 85.6,41.02
AGND4
  Bottom 2.54: X5.2 -0.61,-31.14 -2.41,-29.34 -2.41,-21.72 | -2.41,-21.72 -2.41,-21.59 -2.03,-21.21 2.69,-21.21 X5.4 | X5.6 1.22,-11.1 -1.91,-14.22 -1.91,-21.21 -2.41,-21.72
AGND5
  Bottom 2.54: X6.2 87.91,-31.14 86.11,-29.34 86.11,-21.72 | 86.11,-21.72 86.11,-21.59 86.49,-21.21 91.21,-21.21 X6.4 | X6.6 89.74,-11.1 86.61,-14.22 86.61,-21.21 86.11,-21.72
DB1
  Bottom 0.508: IC2.11 131.9,118.31 LCD3.1
DB2
  Bottom 0.508: IC2.12 132.7,113.77 136.14,117.22 LCD3.2
DB3
  Bottom 0.508: IC2.13 133.5,112.92 138.68,118.11 LCD3.3
DB4
  Bottom 0.508: IC1.11 43.38,118.31 LCD1.1
DB5
  Bottom 0.508: IC1.12 44.18,113.77 47.62,117.22 LCD1.2
DB6
  Bottom 0.508: IC1.13 44.98,112.92 50.16,118.11 LCD1.3
DB7
  Bottom 0.508: IC1.14 45.78,111.69 52.7,118.62 LCD1.4
DB8
  Bottom 0.508: IC2.14 134.3,111.69 141.22,118.62 LCD3.4
DB9
  Bottom 0.508: IC3.11 43.12,54.81 LCD5.1
DB10
  Bottom 0.508: IC3.12 43.92,50.27 47.37,53.72 LCD5.2
DB11
  Bottom 0.508: IC3.13 44.72,49.42 49.91,54.61 LCD5.3
DB12
  Bottom 0.508: IC3.14 45.52,48.19 52.45,55.12 LCD5.4
DB13
  Bottom 0.508: IC4.11 131.64,54.81 LCD7.1
DB14
  Bottom 0.508: IC4.12 132.44,50.27 135.89,53.72 LCD7.2
DB15
  Bottom 0.508: IC4.13 133.24,49.42 138.43,54.61 LCD7.3
DB16
  Bottom 0.508: IC4.14 134.04,48.19 140.97,55.12 LCD7.4
DB17
  Bottom 0.508: IC5.11 43.63,-7.93 LCD9.1
DB18
  Bottom 0.508: IC5.12 44.43,-12.46 47.88,-9.02 LCD9.2
DB19
  Bottom 0.508: IC5.13 45.23,-13.32 50.42,-8.13 LCD9.3
DB20
  Bottom 0.508: IC5.14 46.03,-14.55 52.96,-7.62 LCD9.4
DB21
  Bottom 0.508: IC6.11 132.15,-7.93 LCD11.1
DB22
  Bottom 0.508: IC6.12 132.95,-12.46 136.4,-9.02 LCD11.2
DB23
  Bottom 0.508: IC6.13 133.75,-13.32 138.94,-8.13 LCD11.3
DB24
  Bottom 0.508: IC6.14 134.55,-14.55 141.48,-7.62 LCD11.4
E
  Bottom 0.508: IC1.10 42.55,103.35 42.55,111.89 39.24,115.19 LCD2.6
E1
  Bottom 0.508: IC2.10 131.06,103.35 131.06,111.89 127.76,115.19 LCD4.6
E2
  Bottom 0.508: IC3.10 42.29,39.85 42.29,48.39 38.99,51.69 LCD6.6
E3
  Bottom 0.508: IC4.10 130.81,39.85 130.81,48.39 127.51,51.69 LCD8.6
E4
  Bottom 0.508: IC5.10 42.8,-22.89 42.8,-14.35 39.5,-11.05 LCD10.6
E5
  Bottom 0.508: IC6.10 131.32,-22.89 131.32,-14.35 128.02,-11.05 LCD12.6
GND
  Bottom 0.406: LCD2.5 36.7,121.03 36.07,121.67 | 36.07,121.67 33.53,121.67 32.89,121.03 32.89,115.7 32.38,115.19 31.63,115.19 R5.2 | MIESZANIE.2 23.88,88.77 27.18,92.08 27.18,97.03 27.43,97.28 | 27.3,97.28 27.43,97.28 | 27.43,97.28 29.46,97.28 29.72,97.03 29.72,94.36 31.37,92.71 C3.1 | IC1.5 41.42,99.46 42.16,100.2 42.16,101.47 36.83,106.81 34.17,106.81 C4.1 | U$2.4 65.66,103.76 65.34,104.08 64.39,105.03 64.39,106.68 53.98,117.09 53.98,121.16 53.47,121.67 36.07,121.67
  Bottom 0.508: U$2.4 U$2.6 U$2.8 U$2.10 65.66,93.34 66.67,92.33 66.67,89.79 | C1.1 52.82,101.36 52.96,101.22 52.96,99.82 53.21,99.57 54.22,99.57 C2.1 | IC1.21 48.89,98.68 49.91,98.68 50.8,97.79 54.23,97.79 | C2.1 54.23,97.79 | 54.23,97.79 54.23,92.2 55.12,91.31 PRZYCISKI_MIESZ_TEMP.3 | C2.1 54.23,99.95 54.74,100.46 58.42,100.46 59.82,99.06 59.82,91.69 61.59,89.92 66.55,89.92 66.67,89.79 | 66.67,89.79 U$1.A 66.72,84.2 73.41,84.2 74.8,82.8 74.8,73.53 NAPIECIE.1 | IC1.5 40.3,99.44 41.78,99.44 42.04,99.19 42.04,98.17 41.73,97.86 IC1.3 38.94,97.86 C5.1 38.1,93.98 36.83,92.71 34.17,92.71 C3.1 | R5.2 31.62,113.54 | 31.62,113.54 31.62,109.36 C4.1 | TEMP.2 19.68,105.92 18.16,107.44 18.16,111.38 20.45,113.67 26.42,113.67 | 26.42,113.67 31.5,113.67 31.62,113.54 | LCD2.1 26.54,113.79 26.42,113.67 | PRZYCISKI_+-.3 39.88,85.09 39.37,84.58 33.4,84.58 31.24,86.74 31.24,92.58 31.37,92.71 | 65.34,104.08 65.79,103.63 72.52,103.63 73.28,104.39 73.28,115.7 68.96,120.02 LCD1.6 57.91,120.14 57.91,123.19 57.28,123.83 20.32,123.83 15.88,119.38 15.88,87.63 13.08,84.84 5.59,84.84 4.32,83.57 4.32,78.99 5.71,77.6 LM35.3
  pour Bottom (isolate 0.914): -11.43,128.78 85.22,128.78 85.22,63.88 -11.43,63.88
GND1
  Bottom 0.406: LCD4.5 125.22,121.03 124.59,121.67 | 124.59,121.67 122.05,121.67 121.41,121.03 121.41,115.7 120.9,115.19 120.15,115.19 R8.2 | MIESZANIE1.2 112.39,88.77 115.7,92.08 115.7,97.03 115.95,97.28 | 115.82,97.28 115.95,97.28 | 115.95,97.28 117.98,97.28 118.24,97.03 118.24,94.36 119.89,92.71 C8.1 | IC2.5 129.94,99.46 130.68,100.2 130.68,101.47 125.35,106.81 122.69,106.81 C9.1 | U$4.4 154.18,103.76 153.86,104.08 152.91,105.03 152.91,106.68 142.49,117.09 142.49,121.16 141.99,121.67 124.59,121.67
  Bottom 0.508: U$4.4 U$4.6 U$4.8 U$4.10 154.18,93.34 155.19,92.33 155.19,89.79 | C6.1 141.34,101.36 141.48,101.22 141.48,99.82 141.73,99.57 142.74,99.57 C7.1 | IC2.21 137.41,98.68 138.43,98.68 139.32,97.79 142.75,97.79 | C7.1 142.75,97.79 | 142.75,97.79 142.75,92.2 143.64,91.31 PRZYCISKI_MIESZ_TEMP1.3 | C7.1 142.75,99.95 143.26,100.46 146.94,100.46 148.34,99.06 148.34,91.69 150.11,89.92 155.07,89.92 155.19,89.79 | 155.19,89.79 U$3.A 155.24,84.2 161.93,84.2 163.32,82.8 163.32,73.53 NAPIECIE1.1 | IC2.5 128.82,99.44 130.3,99.44 130.56,99.19 130.56,98.17 130.25,97.86 IC2.3 127.46,97.86 C10.1 126.62,93.98 125.35,92.71 122.69,92.71 C8.1 | R8.2 120.14,113.54 | 120.14,113.54 120.14,109.36 C9.1 | TEMP1.2 108.2,105.92 106.68,107.44 106.68,111.38 108.97,113.67 114.94,113.67 | 114.94,113.67 120.02,113.67 120.14,113.54 | LCD4.1 115.06,113.79 114.94,113.67 | PRZYCISKI_+-1.3 128.4,85.09 127.89,84.58 121.92,84.58 119.76,86.74 119.76,92.58 119.89,92.71 | 153.86,104.08 154.31,103.63 161.04,103.63 161.8,104.39 161.8,115.7 157.48,120.02 LCD3.6 146.43,120.14 146.43,123.19 145.8,123.83 108.84,123.83 104.39,119.38 104.39,87.63 101.6,84.84 94.11,84.84 92.84,83.57 92.84,78.99 94.23,77.6 LM1.3
  pour Bottom (isolate 0.914): 77.09,128.78 173.74,128.78 173.74,63.88 77.09,63.88
GND2
  Bottom 0.406: LCD6.5 36.45,57.53 35.81,58.17 | 35.81,58.17 33.27,58.17 32.64,57.53 32.64,52.2 32.13,51.69 R12.2 | MIESZANIE2.2 23.62,25.27 26.92,28.57 26.92,33.53 27.18,33.78 | 27.05,33.78 27.18,33.78 | 27.18,33.78 29.21,33.78 29.46,33.53 29.46,30.86 31.11,29.21 33.9,29.21 C13.1 | IC3.5 41.17,35.96 41.91,36.7 41.91,37.97 36.58,43.31 33.92,43.31 C14.1 | U$6.4 65.41,40.26 65.09,40.58 64.14,41.53 64.14,43.18 53.72,53.59 53.72,57.66 53.21,58.17 35.81,58.17
  Bottom 0.508: U$6.4 U$6.6 U$6.8 U$6.10 65.41,29.84 66.42,28.83 66.42,26.29 | C11.1 52.57,37.86 52.7,37.72 52.7,36.32 52.96,36.07 53.96,36.07 C12.1 | IC3.21 48.63,35.18 49.66,35.18 50.55,34.29 53.98,34.29 | C12.1 53.98,34.29 | 53.98,34.29 53.98,28.7 54.86,27.81 PRZYCISKI_MIESZ_TEMP2.3 | C12.1 53.98,36.45 54.48,36.96 58.17,36.96 59.56,35.56 59.56,28.19 61.34,26.42 66.29,26.42 66.42,26.29 | 66.42,26.29 U$5.A 66.46,20.7 73.15,20.7 74.55,19.3 74.55,10.03 NAPIECIE2.1 | IC3.5 40.05,35.94 41.53,35.94 41.78,35.69 41.78,34.67 41.47,34.36 IC3.3 38.69,34.36 C15.1 37.85,30.48 36.58,29.21 C13.1 | R12.2 31.37,50.04 | 31.37,50.04 31.37,45.86 C14.1 | TEMP2.2 19.43,42.42 17.91,43.94 17.91,47.88 20.19,50.16 26.16,50.16 | 26.16,50.16 31.24,50.16 31.37,50.04 | LCD6.1 26.29,50.29 26.16,50.16 | PRZYCISKI_+-2.3 39.62,21.59 39.12,21.08 33.15,21.08 30.99,23.24 30.99,29.08 31.11,29.21 | 65.09,40.58 65.53,40.13 72.26,40.13 73.03,40.89 73.03,52.2 68.71,56.52 LCD5.6 57.66,56.64 57.66,59.69 57.02,60.33 20.07,60.33 15.62,55.88 15.62,24.13 12.83,21.34 5.33,21.34 4.06,20.07 4.06,15.49 5.46,14.1 LM2.3
  pour Bottom (isolate 0.914): -11.68,65.28 84.96,65.28 84.96,0.38 -11.68,0.38
GND3
  Bottom 0.406: LCD8.5 124.97,57.53 124.33,58.17 | 124.33,58.17 121.79,58.17 121.16,57.53 121.16,52.2 120.65,51.69 R16.2 | MIESZANIE3.2 112.14,25.27 115.44,28.57 115.44,33.53 115.7,33.78 | 115.57,33.78 115.7,33.78 | 115.7,33.78 117.73,33.78 117.98,33.53 117.98,30.86 119.63,29.21 122.42,29.21 C18.1 | IC4.5 129.69,35.96 130.43,36.7 130.43,37.97 125.09,43.31 122.44,43.31 C19.1 | U$8.4 153.92,40.26 153.61,40.58 152.65,41.53 152.65,43.18 142.24,53.59 142.24,57.66 141.73,58.17 124.33,58.17
  Bottom 0.508: U$8.4 U$8.6 U$8.8 U$8.10 153.92,29.84 154.94,28.83 154.94,26.29 | C16.1 141.09,37.86 141.22,37.72 141.22,36.32 141.48,36.07 C17.1 | IC4.21 137.15,35.18 138.18,35.18 139.06,34.29 142.49,34.29 | C17.1 142.49,34.29 | 142.49,34.29 142.49,28.7 143.38,27.81 PRZYCISKI_MIESZ_TEMP3.3 | C17.1 142.49,36.45 143,36.96 146.69,36.96 148.08,35.56 148.08,28.19 149.86,26.42 154.81,26.42 154.94,26.29 | 154.94,26.29 U$7.A 154.98,20.7 161.67,20.7 163.07,19.3 163.07,10.03 NAPIECIE3.1 | IC4.5 128.57,35.94 130.05,35.94 130.3,35.69 130.3,34.67 129.99,34.36 IC4.3 127.21,34.36 C20.1 126.36,30.48 125.09,29.21 C18.1 | R16.2 119.89,50.04 | 119.89,50.04 119.89,45.86 C19.1 | TEMP3.2 107.95,42.42 106.43,43.94 106.43,47.88 108.71,50.16 114.68,50.16 | 114.68,50.16 119.76,50.16 119.89,50.04 | LCD8.1 114.81,50.29 114.68,50.16 | PRZYCISKI_+-3.3 128.14,21.59 127.64,21.08 121.67,21.08 119.51,23.24 119.51,29.08 119.63,29.21 | 153.61,40.58 154.05,40.13 160.78,40.13 161.54,40.89 161.54,52.2 157.23,56.52 LCD7.6 146.18,56.64 146.18,59.69 145.54,60.33 108.58,60.33 104.14,55.88 104.14,24.13 101.35,21.34 93.85,21.34 92.58,20.07 92.58,15.49 93.98,14.1 LM3.3
  pour Bottom (isolate 0.914): 76.83,65.28 173.48,65.28 173.48,0.38 76.83,0.38
GND4
  Bottom 0.406: LCD10.5 36.96,-5.21 36.32,-4.57 | 36.32,-4.57 33.78,-4.57 33.15,-5.21 33.15,-10.54 32.64,-11.05 31.89,-11.05 R20.2 | MIESZANIE4.2 24.13,-37.47 27.43,-34.16 27.43,-29.21 27.69,-28.96 | 27.56,-28.96 27.69,-28.96 | 27.69,-28.96 29.72,-28.96 29.97,-29.21 29.97,-31.88 31.62,-33.53 34.41,-33.53 C23.1 | IC5.5 41.67,-26.78 42.42,-26.04 42.42,-24.77 37.08,-19.43 34.43,-19.43 C24.1 | U$10.4 65.91,-22.48 65.6,-22.16 64.64,-21.21 64.64,-19.56 54.23,-9.14 54.23,-5.08 53.72,-4.57 36.32,-4.57
  Bottom 0.508: U$10.4 U$10.6 U$10.8 U$10.10 65.91,-32.89 66.93,-33.91 66.93,-36.45 | C21.1 53.08,-24.88 53.21,-25.02 53.21,-26.42 53.47,-26.67 C22.1 | IC5.21 49.14,-27.56 50.16,-27.56 51.05,-28.45 54.48,-28.45 | C22.1 54.48,-28.45 | 54.48,-28.45 54.48,-34.04 55.37,-34.92 PRZYCISKI_MIESZ_TEMP4.3 | C22.1 54.48,-26.29 54.99,-25.78 58.67,-25.78 60.07,-27.18 60.07,-34.54 61.85,-36.32 66.8,-36.32 66.93,-36.45 | 66.93,-36.45 U$9.A 66.97,-42.04 73.66,-42.04 75.06,-43.43 75.06,-52.7 NAPIECIE4.1 | IC5.5 40.56,-26.8 42.04,-26.8 42.29,-27.05 42.29,-28.07 41.98,-28.38 IC5.3 39.2,-28.38 C25.1 38.35,-32.26 37.08,-33.53 34.43,-33.53 C23.1 | R20.2 31.88,-12.7 | 31.88,-12.7 31.88,-16.88 C24.1 | TEMP4.2 19.94,-20.32 18.41,-18.8 18.41,-14.86 20.7,-12.57 26.67,-12.57 | 26.67,-12.57 31.75,-12.57 31.88,-12.7 | LCD10.1 26.8,-12.45 26.67,-12.57 | PRZYCISKI_+-4.3 40.13,-41.15 39.62,-41.66 33.66,-41.66 31.5,-39.5 31.5,-33.66 31.62,-33.53 | 65.6,-22.16 66.04,-22.61 72.77,-22.61 73.53,-21.84 73.53,-10.54 69.22,-6.22 LCD9.6 58.17,-6.1 58.17,-3.05 57.53,-2.41 20.57,-2.41 16.13,-6.86 16.13,-38.61 13.34,-41.4 5.84,-41.4 4.57,-42.67 4.57,-47.24 5.97,-48.64 LM4.3
  pour Bottom (isolate 0.914): -11.18,2.54 85.47,2.54 85.47,-62.36 -11.18,-62.36
GND5
  Bottom 0.406: LCD12.5 125.48,-5.21 124.84,-4.57 | 124.84,-4.57 122.3,-4.57 121.67,-5.21 121.67,-10.54 121.16,-11.05 120.41,-11.05 R24.2 | MIESZANIE5.2 112.65,-37.47 115.95,-34.16 115.95,-29.21 116.2,-28.96 | 116.08,-28.96 116.2,-28.96 | 116.2,-28.96 118.24,-28.96 118.49,-29.21 118.49,-31.88 120.14,-33.53 122.92,-33.53 C28.1 | IC6.5 130.19,-26.78 130.94,-26.04 130.94,-24.77 125.6,-19.43 122.95,-19.43 C29.1 | U$12.4 154.43,-22.48 154.11,-22.16 153.16,-21.21 153.16,-19.56 142.75,-9.14 142.75,-5.08 142.24,-4.57 124.84,-4.57
  Bottom 0.508: U$12.4 U$12.6 U$12.8 U$12.10 154.43,-32.89 155.45,-33.91 155.45,-36.45 | C26.1 141.59,-24.88 141.73,-25.02 141.73,-26.42 141.99,-26.67 C27.1 | IC6.21 137.66,-27.56 138.68,-27.56 139.57,-28.45 143,-28.45 | C27.1 143,-28.45 | 143,-28.45 143,-34.04 143.89,-34.92 PRZYCISKI_MIESZ_TEMP5.3 | C27.1 143,-26.29 143.51,-25.78 147.19,-25.78 148.59,-27.18 148.59,-34.54 150.37,-36.32 155.32,-36.32 155.45,-36.45 | 155.45,-36.45 U$11.A 155.49,-42.04 162.18,-42.04 163.58,-43.43 163.58,-52.7 NAPIECIE5.1 | IC6.5 129.08,-26.8 130.56,-26.8 130.81,-27.05 130.81,-28.07 130.5,-28.38 IC6.3 127.72,-28.38 C30.1 126.87,-32.26 125.6,-33.53 122.95,-33.53 C28.1 | R24.2 120.4,-12.7 | 120.4,-12.7 120.4,-16.88 C29.1 | TEMP5.2 108.46,-20.32 106.93,-18.8 106.93,-14.86 109.22,-12.57 115.19,-12.57 | 115.19,-12.57 120.27,-12.57 120.4,-12.7 | LCD12.1 115.32,-12.45 115.19,-12.57 | PRZYCISKI_+-5.3 128.65,-41.15 128.14,-41.66 122.17,-41.66 120.02,-39.5 120.02,-33.66 120.14,-33.53 | 154.11,-22.16 154.56,-22.61 161.29,-22.61 162.05,-21.84 162.05,-10.54 157.73,-6.22 LCD11.6 146.69,-6.1 146.69,-3.05 146.05,-2.41 109.09,-2.41 104.65,-6.86 104.65,-38.61 101.85,-41.4 94.36,-41.4 93.09,-42.67 93.09,-47.24 94.49,-48.64 LM5.3
  pour Bottom (isolate 0.914): 77.34,2.54 173.99,2.54 173.99,-62.36 77.34,-62.36
LM1
  Bottom 0.508: IC2.28 133.5,92.56 135.51,90.55 135.51,89.15 135.25,88.9 132.84,88.9 132.72,88.77 132.72,82.55 130.18,80.01 96.52,80.01 LM1.2
LM2
  Bottom 0.508: IC3.28 44.72,29.06 46.74,27.05 46.74,25.65 46.48,25.4 44.07,25.4 43.94,25.27 43.94,19.05 41.4,16.51 7.75,16.51 LM2.2
LM3
  Bottom 0.508: IC4.28 133.24,29.06 135.25,27.05 135.25,25.65 135,25.4 132.59,25.4 132.46,25.27 132.46,19.05 129.92,16.51 96.27,16.51 LM3.2
LM4
  Bottom 0.508: IC5.28 45.23,-33.67 47.24,-35.69 47.24,-37.08 46.99,-37.34 44.58,-37.34 44.45,-37.47 44.45,-43.69 41.91,-46.23 8.26,-46.23 LM4.2
LM5
  Bottom 0.508: IC6.28 133.75,-33.67 135.76,-35.69 135.76,-37.08 135.51,-37.34 133.1,-37.34 132.97,-37.47 132.97,-43.69 130.43,-46.23 96.77,-46.23 LM5.2
LM35
  Bottom 0.508: IC1.28 44.98,92.56 46.99,90.55 46.99,89.15 46.74,88.9 44.32,88.9 44.2,88.77 44.2,82.55 41.66,80.01 8,80.01 LM35.2
MIESZANIE
  Bottom 0.508: IC1.31 42.58,85.38 40.64,83.44 31.37,83.44 28.07,86.74 28.07,96.12 Q2.1
MIESZANIE1
  Bottom 0.508: IC2.31 131.1,85.38 129.16,83.44 119.89,83.44 116.59,86.74 116.59,96.12 Q4.1
MIESZANIE2
  Bottom 0.508: IC3.31 42.32,21.88 40.39,19.94 31.11,19.94 27.81,23.24 27.81,32.62 Q6.1
MIESZANIE3
  Bottom 0.508: IC4.31 130.84,21.88 128.91,19.94 119.63,19.94 116.33,23.24 116.33,32.62 Q8.1
MIESZANIE4
  Bottom 0.508: IC5.31 42.83,-40.86 40.89,-42.8 31.62,-42.8 28.32,-39.5 28.32,-30.12 Q10.1
MIESZANIE5
  Bottom 0.508: IC6.31 131.35,-40.86 129.41,-42.8 120.14,-42.8 116.84,-39.5 116.84,-30.12 Q12.1
MISO
  Bottom 0.406: U$2.9 63.25,96.01 64.39,97.16 64.39,101.98 64.01,102.36 61.72,102.36 61.47,102.62 61.47,104.14 60.71,104.9 48.93,104.9 IC1.16
MISO1
  Bottom 0.406: U$4.9 151.76,96.01 152.91,97.16 152.91,101.98 152.53,102.36 150.24,102.36 149.99,102.62 149.99,104.14 149.22,104.9 137.44,104.9 IC2.16
MISO2
  Bottom 0.406: U$6.9 62.99,32.51 64.14,33.66 64.14,38.48 63.75,38.86 61.47,38.86 61.21,39.12 61.21,40.64 60.45,41.4 48.67,41.4 IC3.16
MISO3
  Bottom 0.406: U$8.9 151.51,32.51 152.65,33.66 152.65,38.48 152.27,38.86 149.99,38.86 149.73,39.12 149.73,40.64 148.97,41.4 137.19,41.4 IC4.16
MISO4
  Bottom 0.406: U$10.9 63.5,-30.23 64.64,-29.08 64.64,-24.26 64.26,-23.88 61.98,-23.88 61.72,-23.62 61.72,-22.1 60.96,-21.34 49.18,-21.34 IC5.16
MISO5
  Bottom 0.406: U$12.9 152.02,-30.23 153.16,-29.08 153.16,-24.26 152.78,-23.88 150.5,-23.88 150.24,-23.62 150.24,-22.1 149.48,-21.34 137.7,-21.34 IC6.16
MOSI
  Bottom 0.508: U$2.1 47.5,106.17 46.61,105.28 46.61,103.39 IC1.15
MOSI1
  Bottom 0.508: U$4.1 136.02,106.17 135.13,105.28 135.13,103.39 IC2.15
MOSI2
  Bottom 0.508: U$6.1 47.24,42.67 46.35,41.78 46.35,39.88 IC3.15
MOSI3
  Bottom 0.508: U$8.1 135.76,42.67 134.87,41.78 134.87,39.88 IC4.15
MOSI4
  Bottom 0.508: U$10.1 47.75,-20.07 46.86,-20.95 46.86,-22.85 IC5.15
MOSI5
  Bottom 0.508: U$12.1 136.27,-20.07 135.38,-20.95 135.38,-22.85 IC6.15
N$1
  Bottom 0.406: 43.05,97.54 42.04,96.52 | 42.04,96.52 42.16,97.16 | 42.04,96.52 42.67,96.77
N$2
  Bottom 0.508: IC1.18 50.01,101.06 50.29,101.35 50.29,101.98 50.67,102.36 53.22,102.36 C2.2 L1.2
N$3
  Bottom 0.508: IC1.20 51.59,99.46 C1.2
N$4
  Bottom 0.508: Q1.2 28.13,107.51 27.18,108.46 TEMP.1
N$5
  Bottom 0.508: Q2.2 26.23,92.9 24.64,91.31 MIESZANIE.1
N$6
  Bottom 0.508: Y1.1 C4.2 35.7,105.02 38.86,101.85 IC1.8
N$7
  Bottom 0.508: C3.2 Y1.2 35.05,97.28 35.43,97.66 35.43,100.33 36.16,101.06 IC1.7
N$8
  Bottom 0.508: NAPIECIE.2 70.48,75.38 R3.1
N$9
  Bottom 0.508: IC2.18 138.53,101.06 138.81,101.35 138.81,101.98 139.19,102.36 141.74,102.36 C7.2 L2.2
N$10
  Bottom 1.27: TEMP_PRZEKAZNIK.2 13.84,101.73 12.19,100.08 2.56,100.08
  Bottom 2.54: 2.56,100.08 X1.3
N$11
  Bottom 0.508: U$2.2 70.55,106.17 R4.1
N$12
  Bottom 0.508: IC2.20 140.11,99.46 C6.2
N$13
  Bottom 0.508: Y2.1 C9.2 124.22,105.02 127.38,101.85 IC2.8
N$14
  Bottom 1.27: X1.5 2.56,110.11 12.32,110.11 12.32,109.98 TEMP_PRZEKAZNIK.1
  Bottom 2.54: 2.69,109.98 X1.5
N$15
  Bottom 0.508: C8.2 Y2.2 123.57,97.28 123.95,97.66 123.95,100.33 124.68,101.06 IC2.7
N$16
  Bottom 0.508: LCD2.3 R5.1
N$17
  Bottom 0.508: Q3.2 116.65,107.51 115.7,108.46 TEMP1.1
N$18
  Bottom 0.508: Q4.2 114.75,92.9 113.16,91.31 MIESZANIE1.1
N$19
  Bottom 1.27: X2.5 91.08,110.11 100.84,110.11 100.84,109.98 TEMP_PRZEKAZNIK1.1
  Bottom 2.54: 91.21,109.98 X2.5
N$20
  Bottom 0.508: NAPIECIE1.2 159,75.38 R6.1
N$21
  Bottom 1.27: TEMP_PRZEKAZNIK1.2 102.36,101.73 100.71,100.08 91.08,100.08
  Bottom 2.54: 91.08,100.08 X2.3
N$22
  Bottom 0.508: U$4.2 159.06,106.17 R7.1
N$23
  Bottom 0.508: LCD4.3 R8.1
N$24
  Bottom 0.406: 131.57,97.54 130.56,96.52 | 130.56,96.52 130.68,97.16 | 130.56,96.52 131.19,96.77
N$25
  Bottom 0.508: IC3.18 49.75,37.56 50.04,37.85 50.04,38.48 50.42,38.86 52.97,38.86 C12.2 L3.2
N$26
  Bottom 0.508: IC3.20 51.34,35.96 C11.2
N$27
  Bottom 0.508: Y3.1 C14.2 35.44,41.52 38.61,38.35 IC3.8
N$28
  Bottom 0.508: C13.2 Y3.2 34.8,33.78 35.18,34.16 35.18,36.83 35.91,37.56 IC3.7
N$29
  Bottom 0.508: Q5.2 27.87,44.01 26.92,44.96 TEMP2.1
N$30
  Bottom 0.508: Q6.2 25.97,29.4 24.38,27.81 MIESZANIE2.1
N$31
  Bottom 1.27: X3.5 2.31,46.61 12.06,46.61 12.06,46.48 TEMP_PRZEKAZNIK2.1
  Bottom 2.54: 2.44,46.48 X3.5
N$32
  Bottom 0.508: NAPIECIE2.2 70.23,11.88 R10.1
N$33
  Bottom 1.27: TEMP_PRZEKAZNIK2.2 13.59,38.23 11.94,36.58 2.31,36.58
  Bottom 2.54: 2.31,36.58 X3.3
N$34
  Bottom 0.508: U$6.2 70.29,42.67 R11.1
N$35
  Bottom 0.508: LCD6.3 R12.1
N$36
  Bottom 0.406: 42.8,34.04 41.78,33.02 | 41.78,33.02 41.91,33.66 | 41.78,33.02 42.42,33.27
N$37
  Bottom 0.508: IC4.18 138.27,37.56 138.56,37.85 138.56,38.48 138.94,38.86 141.49,38.86 C17.2 L4.2
N$38
  Bottom 0.508: IC4.20 139.86,35.96 C16.2
N$39
  Bottom 0.508: Y4.1 C19.2 123.96,41.52 127.13,38.35 IC4.8
N$40
  Bottom 0.508: C18.2 Y4.2 123.32,33.78 123.7,34.16 123.7,36.83 124.43,37.56 IC4.7
N$41
  Bottom 0.508: Q7.2 116.39,44.01 115.44,44.96 TEMP3.1
N$42
  Bottom 0.508: Q8.2 114.49,29.4 112.9,27.81 MIESZANIE3.1
N$43
  Bottom 1.27: X4.5 90.83,46.61 100.58,46.61 100.58,46.48 TEMP_PRZEKAZNIK3.1
  Bottom 2.54: 90.96,46.48 X4.5
N$44
  Bottom 0.508: NAPIECIE3.2 158.75,11.88 R14.1
N$45
  Bottom 1.27: TEMP_PRZEKAZNIK3.2 102.11,38.23 100.46,36.58 90.83,36.58
  Bottom 2.54: 90.83,36.58 X4.3
N$46
  Bottom 0.508: U$8.2 158.81,42.67 R15.1
N$47
  Bottom 0.508: LCD8.3 R16.1
N$48
  Bottom 0.406: 131.32,34.04 130.3,33.02 | 130.3,33.02 130.43,33.66 | 130.3,33.02 130.94,33.27
N$49
  Bottom 0.508: IC5.18 50.26,-25.18 50.55,-24.89 50.55,-24.26 50.93,-23.88 53.48,-23.88 C22.2 L5.2
N$50
  Bottom 0.508: IC5.20 51.85,-26.78 C21.2
N$51
  Bottom 0.508: Y5.1 C24.2 35.95,-21.22 39.12,-24.38 IC5.8
N$52
  Bottom 0.508: C23.2 Y5.2 35.31,-28.96 35.69,-28.57 35.69,-25.91 36.42,-25.18 IC5.7
N$53
  Bottom 0.508: Q9.2 28.38,-18.73 27.43,-17.78 TEMP4.1
N$54
  Bottom 0.508: Q10.2 26.48,-33.34 24.89,-34.92 MIESZANIE4.1
N$55
  Bottom 1.27: X5.5 2.82,-16.13 12.57,-16.13 12.57,-16.26 TEMP_PRZEKAZNIK4.1
  Bottom 2.54: 2.95,-16.26 X5.5
N$56
  Bottom 0.508: NAPIECIE4.2 70.74,-50.86 R18.1
N$57
  Bottom 1.27: TEMP_PRZEKAZNIK4.2 14.1,-24.51 12.45,-26.16 2.82,-26.16
  Bottom 2.54: 2.82,-26.16 X5.3
N$58
  Bottom 0.508: U$10.2 70.8,-20.07 R19.1
N$59
  Bottom 0.508: LCD10.3 R20.1
N$60
  Bottom 0.406: 43.31,-28.7 42.29,-29.72 | 42.29,-29.72 42.42,-29.08 | 42.29,-29.72 42.93,-29.46
N$61
  Bottom 0.508: IC6.18 138.78,-25.18 139.06,-24.89 139.06,-24.26 139.45,-23.88 142,-23.88 C27.2 L6.2
N$62
  Bottom 0.508: IC6.20 140.37,-26.78 C26.2
N$63
  Bottom 0.508: Y6.1 C29.2 124.47,-21.22 127.64,-24.38 IC6.8
N$64
  Bottom 0.508: C28.2 Y6.2 123.83,-28.96 124.21,-28.57 124.21,-25.91 124.94,-25.18 IC6.7
N$65
  Bottom 0.508: Q11.2 116.9,-18.73 115.95,-17.78 TEMP5.1
N$66
  Bottom 0.508: Q12.2 115,-33.34 113.41,-34.92 MIESZANIE5.1
N$67
  Bottom 1.27: X6.5 91.34,-16.13 101.09,-16.13 101.09,-16.26 TEMP_PRZEKAZNIK5.1
  Bottom 2.54: 91.47,-16.26 X6.5
N$68
  Bottom 0.508: NAPIECIE5.2 159.26,-50.86 R22.1
N$69
  Bottom 1.27: TEMP_PRZEKAZNIK5.2 102.62,-24.51 100.97,-26.16 91.34,-26.16
  Bottom 2.54: 91.34,-26.16 X6.3
N$70
  Bottom 0.508: U$12.2 159.32,-20.07 R23.1
N$71
  Bottom 0.508: LCD12.3 R24.1
N$72
  Bottom 0.406: 131.83,-28.7 130.81,-29.72 | 130.81,-29.72 130.94,-29.08 | 130.81,-29.72 131.44,-29.46
PRZYCISK+
  Bottom 0.508: PRZYCISKI_+-.2 37.34,87.38 41.78,91.82 IC1.32
PRZYCISK+1
  Bottom 0.508: PRZYCISKI_+-1.2 125.86,87.38 130.3,91.82 IC2.32
PRZYCISK+2
  Bottom 0.508: PRZYCISKI_+-2.2 37.08,23.88 41.53,28.32 IC3.32
PRZYCISK+3
  Bottom 0.508: PRZYCISKI_+-3.2 125.6,23.88 130.05,28.32 IC4.32
PRZYCISK+4
  Bottom 0.508: PRZYCISKI_+-4.2 37.59,-38.86 42.04,-34.42 IC5.32
PRZYCISK+5
  Bottom 0.508: PRZYCISKI_+-5.2 126.11,-38.86 130.56,-34.42 IC6.32
PRZYCISK-
  Bottom 0.508: IC1.1 40.28,93.37 34.8,87.88 PRZYCISKI_+-.1
PRZYCISK-1
  Bottom 0.508: IC2.1 128.8,93.37 123.32,87.88 PRZYCISKI_+-1.1
PRZYCISK-2
  Bottom 0.508: IC3.1 40.03,29.87 34.54,24.38 PRZYCISKI_+-2.1
PRZYCISK-3
  Bottom 0.508: IC4.1 128.55,29.87 123.06,24.38 PRZYCISKI_+-3.1
PRZYCISK-4
  Bottom 0.508: IC5.1 40.54,-32.87 35.05,-38.35 PRZYCISKI_+-4.1
PRZYCISK-5
  Bottom 0.508: IC6.1 129.06,-32.87 123.57,-38.35 PRZYCISKI_+-5.1
PRZYCISK_MIESZANIE
  Bottom 0.508: IC1.27 45.78,93.16 47.37,91.57 49.66,91.57 50.04,91.19 PRZYCISKI_MIESZ_TEMP.1
PRZYCISK_MIESZANIE1
  Bottom 0.508: IC2.27 134.3,93.16 135.89,91.57 138.18,91.57 138.56,91.19 PRZYCISKI_MIESZ_TEMP1.1
PRZYCISK_MIESZANIE2
  Bottom 0.508: IC3.27 45.52,29.66 47.12,28.07 49.4,28.07 49.78,27.69 PRZYCISKI_MIESZ_TEMP2.1
PRZYCISK_MIESZANIE3
  Bottom 0.508: IC4.27 134.04,29.66 135.64,28.07 137.92,28.07 138.3,27.69 PRZYCISKI_MIESZ_TEMP3.1
PRZYCISK_MIESZANIE4
  Bottom 0.508: IC5.27 46.03,-33.08 47.62,-34.67 49.91,-34.67 50.29,-35.05 PRZYCISKI_MIESZ_TEMP4.1
PRZYCISK_MIESZANIE5
  Bottom 0.508: IC6.27 134.55,-33.08 136.14,-34.67 138.43,-34.67 138.81,-35.05 PRZYCISKI_MIESZ_TEMP5.1
PRZYCISK_TEMP
  Bottom 0.508: IC1.26 46.58,93.5 47.62,92.46 51.69,92.46 52.58,91.57 PRZYCISKI_MIESZ_TEMP.2
PRZYCISK_TEMP1
  Bottom 0.508: IC2.26 135.1,93.5 136.14,92.46 140.21,92.46 141.1,91.57 PRZYCISKI_MIESZ_TEMP1.2
PRZYCISK_TEMP2
  Bottom 0.508: IC3.26 46.32,30 47.37,28.96 51.44,28.96 52.32,28.07 PRZYCISKI_MIESZ_TEMP2.2
PRZYCISK_TEMP3
  Bottom 0.508: IC4.26 134.84,30 135.89,28.96 139.95,28.96 140.84,28.07 PRZYCISKI_MIESZ_TEMP3.2
PRZYCISK_TEMP4
  Bottom 0.508: IC5.26 46.83,-32.73 47.88,-33.78 51.94,-33.78 52.83,-34.67 PRZYCISKI_MIESZ_TEMP4.2
PRZYCISK_TEMP5
  Bottom 0.508: IC6.26 135.35,-32.73 136.4,-33.78 140.46,-33.78 141.35,-34.67 PRZYCISKI_MIESZ_TEMP5.2
RESET
  Bottom 0.406: IC1.29 44.2,94.79 44.2,100.84 44.58,101.22 46.74,101.22 49.66,104.14 59.94,104.14 60.33,103.76 60.33,102.49 61.72,101.09 U$2.5
  Bottom 0.508: IC1.29 44.18,91.09 R1.1
RESET1
  Bottom 0.406: IC2.29 132.72,94.79 132.72,100.84 133.1,101.22 135.25,101.22 138.18,104.14 148.46,104.14 148.84,103.76 148.84,102.49 150.24,101.09 U$4.5
  Bottom 0.508: IC2.29 132.7,91.09 R2.1
RESET2
  Bottom 0.406: IC3.29 43.94,31.29 43.94,37.34 44.32,37.72 46.48,37.72 49.4,40.64 59.69,40.64 60.07,40.26 60.07,38.99 61.47,37.59 U$6.5
  Bottom 0.508: IC3.29 43.92,27.59 R9.1
RESET3
  Bottom 0.406: IC4.29 132.46,31.29 132.46,37.34 132.84,37.72 135,37.72 137.92,40.64 148.21,40.64 148.59,40.26 148.59,38.99 149.99,37.59 U$8.5
  Bottom 0.508: IC4.29 132.44,27.59 R13.1
RESET4
  Bottom 0.406: IC5.29 44.45,-31.45 44.45,-25.4 44.83,-25.02 46.99,-25.02 49.91,-22.1 60.2,-22.1 60.58,-22.48 60.58,-23.75 61.98,-25.15 U$10.5
  Bottom 0.508: IC5.29 44.43,-35.15 R17.1
RESET5
  Bottom 0.406: IC6.29 132.97,-31.45 132.97,-25.4 133.35,-25.02 135.51,-25.02 138.43,-22.1 148.72,-22.1 149.1,-22.48 149.1,-23.75 150.5,-25.15 U$12.5
  Bottom 0.508: IC6.29 132.95,-35.15 R21.1
RS
  Bottom 0.508: IC1.9 41.78,111.13 37.97,114.94 34.67,114.94 34.16,115.44 LCD2.4
RS1
  Bottom 0.508: IC2.9 130.3,111.13 126.49,114.94 123.19,114.94 122.68,115.44 LCD4.4
RS2
  Bottom 0.508: IC3.9 41.52,47.63 37.72,51.44 34.42,51.44 33.91,51.94 LCD6.4
RS3
  Bottom 0.508: IC4.9 130.04,47.63 126.24,51.44 122.94,51.44 122.43,51.94 LCD8.4
RS4
  Bottom 0.508: IC5.9 42.03,-15.11 38.23,-11.3 34.92,-11.3 34.42,-10.79 LCD10.4
RS5
  Bottom 0.508: IC6.9 130.55,-15.11 126.75,-11.3 123.44,-11.3 122.94,-10.79 LCD12.4
SCK
  Bottom 0.406: IC1.17
  Bottom 0.508: U$2.7 62.48,98.55 59.31,101.73 59.31,102.87 58.93,103.25 50.26,103.25 IC1.17
SCK1
  Bottom 0.406: IC2.17
  Bottom 0.508: U$4.7 151,98.55 147.83,101.73 147.83,102.87 147.45,103.25 138.78,103.25 IC2.17
SCK2
  Bottom 0.406: IC3.17
  Bottom 0.508: U$6.7 62.23,35.05 59.05,38.23 59.05,39.37 58.67,39.75 50.01,39.75 IC3.17
SCK3
  Bottom 0.406: IC4.17
  Bottom 0.508: U$8.7 150.75,35.05 147.57,38.23 147.57,39.37 147.19,39.75 138.53,39.75 IC4.17
SCK4
  Bottom 0.406: IC5.17
  Bottom 0.508: U$10.7 62.74,-27.69 59.56,-24.51 59.56,-23.37 59.18,-22.99 50.52,-22.99 IC5.17
SCK5
  Bottom 0.406: IC6.17
  Bottom 0.508: U$12.7 151.26,-27.69 148.08,-24.51 148.08,-23.37 147.7,-22.99 139.03,-22.99 IC6.17
TEMP
  Bottom 0.508: IC1.30 43.38,84.91 40.89,82.42 21.59,82.42 18.92,85.09 18.92,98.81 23.88,103.76 26.18,103.76 Q1.1
TEMP1
  Bottom 0.508: IC2.30 131.9,84.91 129.41,82.42 110.11,82.42 107.44,85.09 107.44,98.81 112.39,103.76 114.7,103.76 Q3.1
TEMP2
  Bottom 0.508: IC3.30 43.12,21.41 40.64,18.92 21.34,18.92 18.67,21.59 18.67,35.31 23.62,40.26 25.93,40.26 Q5.1
TEMP3
  Bottom 0.508: IC4.30 131.64,21.41 129.16,18.92 109.86,18.92 107.19,21.59 107.19,35.31 112.14,40.26 114.45,40.26 Q7.1
TEMP4
  Bottom 0.508: IC5.30 43.63,-41.33 41.15,-43.81 21.84,-43.81 19.18,-41.15 19.18,-27.43 24.13,-22.48 26.44,-22.48 Q9.1
TEMP5
  Bottom 0.508: IC6.30 132.15,-41.33 129.67,-43.81 110.36,-43.81 107.7,-41.15 107.7,-27.43 112.65,-22.48 114.96,-22.48 Q11.1
VDD
  Bottom 2.54: X1.1 10.87,90.09 10.92,90.04 12.45,90.04 | 12.45,90.04 PRZEKAZNIK_NAPIECIE.2 | PRZEKAZNIK_NAPIECIE.1 12.45,90.04
VDD1
  Bottom 2.54: X2.1 99.39,90.09 99.44,90.04 100.97,90.04 | 100.97,90.04 PRZEKAZNIK_NAPIECIE1.2 | PRZEKAZNIK_NAPIECIE1.1 100.97,90.04
VDD2
  Bottom 2.54: X3.1 10.62,26.59 10.67,26.54 12.19,26.54 | 12.19,26.54 PRZEKAZNIK_NAPIECIE2.2 | PRZEKAZNIK_NAPIECIE2.1 12.19,26.54
VDD3
  Bottom 2.54: X4.1 99.14,26.59 99.19,26.54 100.71,26.54 | 100.71,26.54 PRZEKAZNIK_NAPIECIE3.2 | PRZEKAZNIK_NAPIECIE3.1 100.71,26.54
VDD4
  Bottom 2.54: X5.1 11.12,-36.14 11.18,-36.2 12.7,-36.2 | 12.7,-36.2 PRZEKAZNIK_NAPIECIE4.2 | PRZEKAZNIK_NAPIECIE4.1 12.7,-36.2
VDD5
  Bottom 2.54: X6.1 99.64,-36.14 99.69,-36.2 101.22,-36.2 | 101.22,-36.2 PRZEKAZNIK_NAPIECIE5.2 | PRZEKAZNIK_NAPIECIE5.1 101.22,-36.2